# Altium PCB Rev3_3_PCB.PcbDoc (part 1 of 2)
Units mm, origin at the board's own origin, x right, y up, seen from the top; angles counter-clockwise.
Board outline 83.3 x 97.3 mm, 4 copper layers (Top Layer, Ground, Power, Bottom Layer), stack 1.527 mm thick; 95 components, 66 nets, 384 pads, 113 vias.
Unrouted connection lines stored in the file: 27.
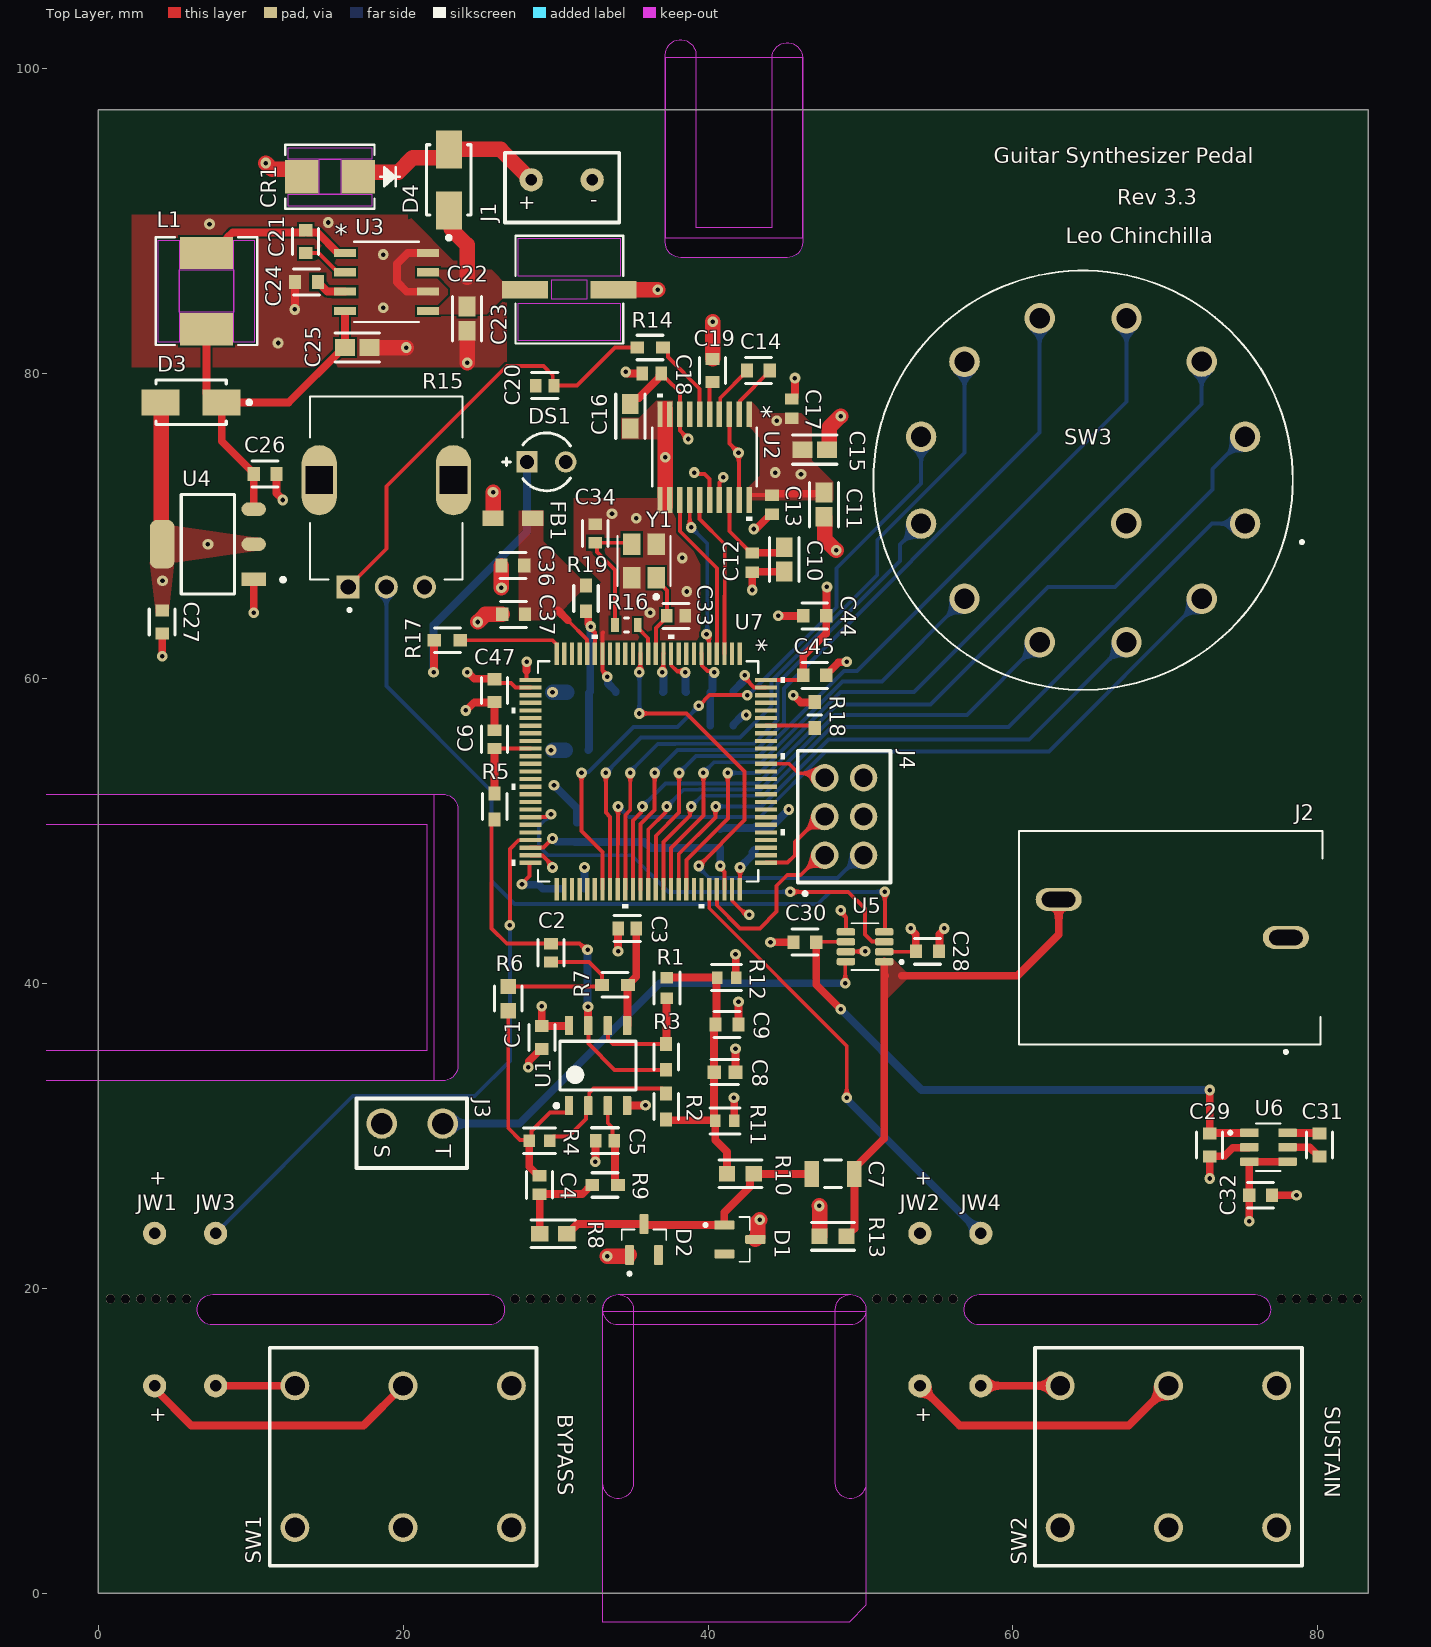
[diagram p0: Top Layer view]
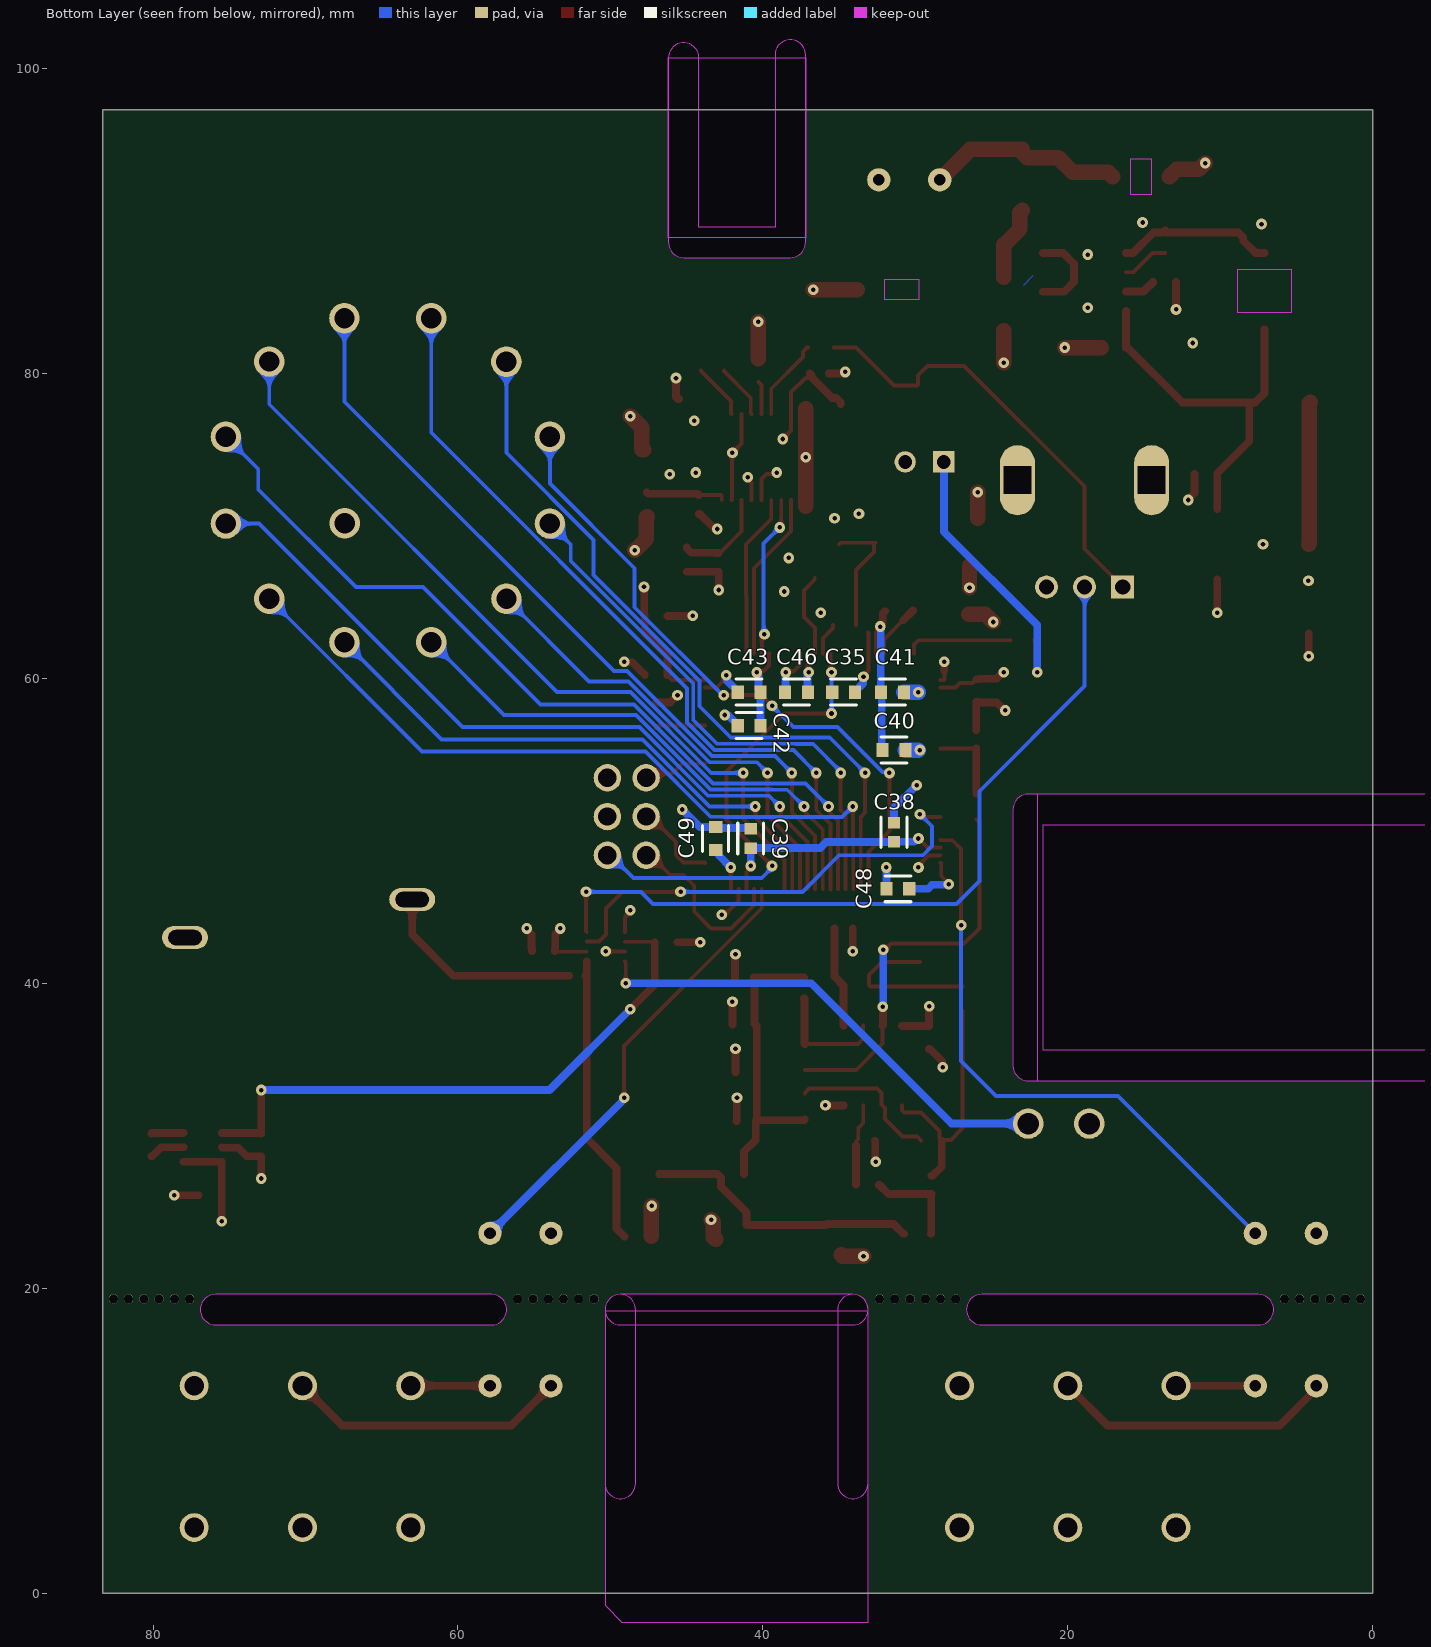
[diagram p1: Bottom Layer view, seen from below]
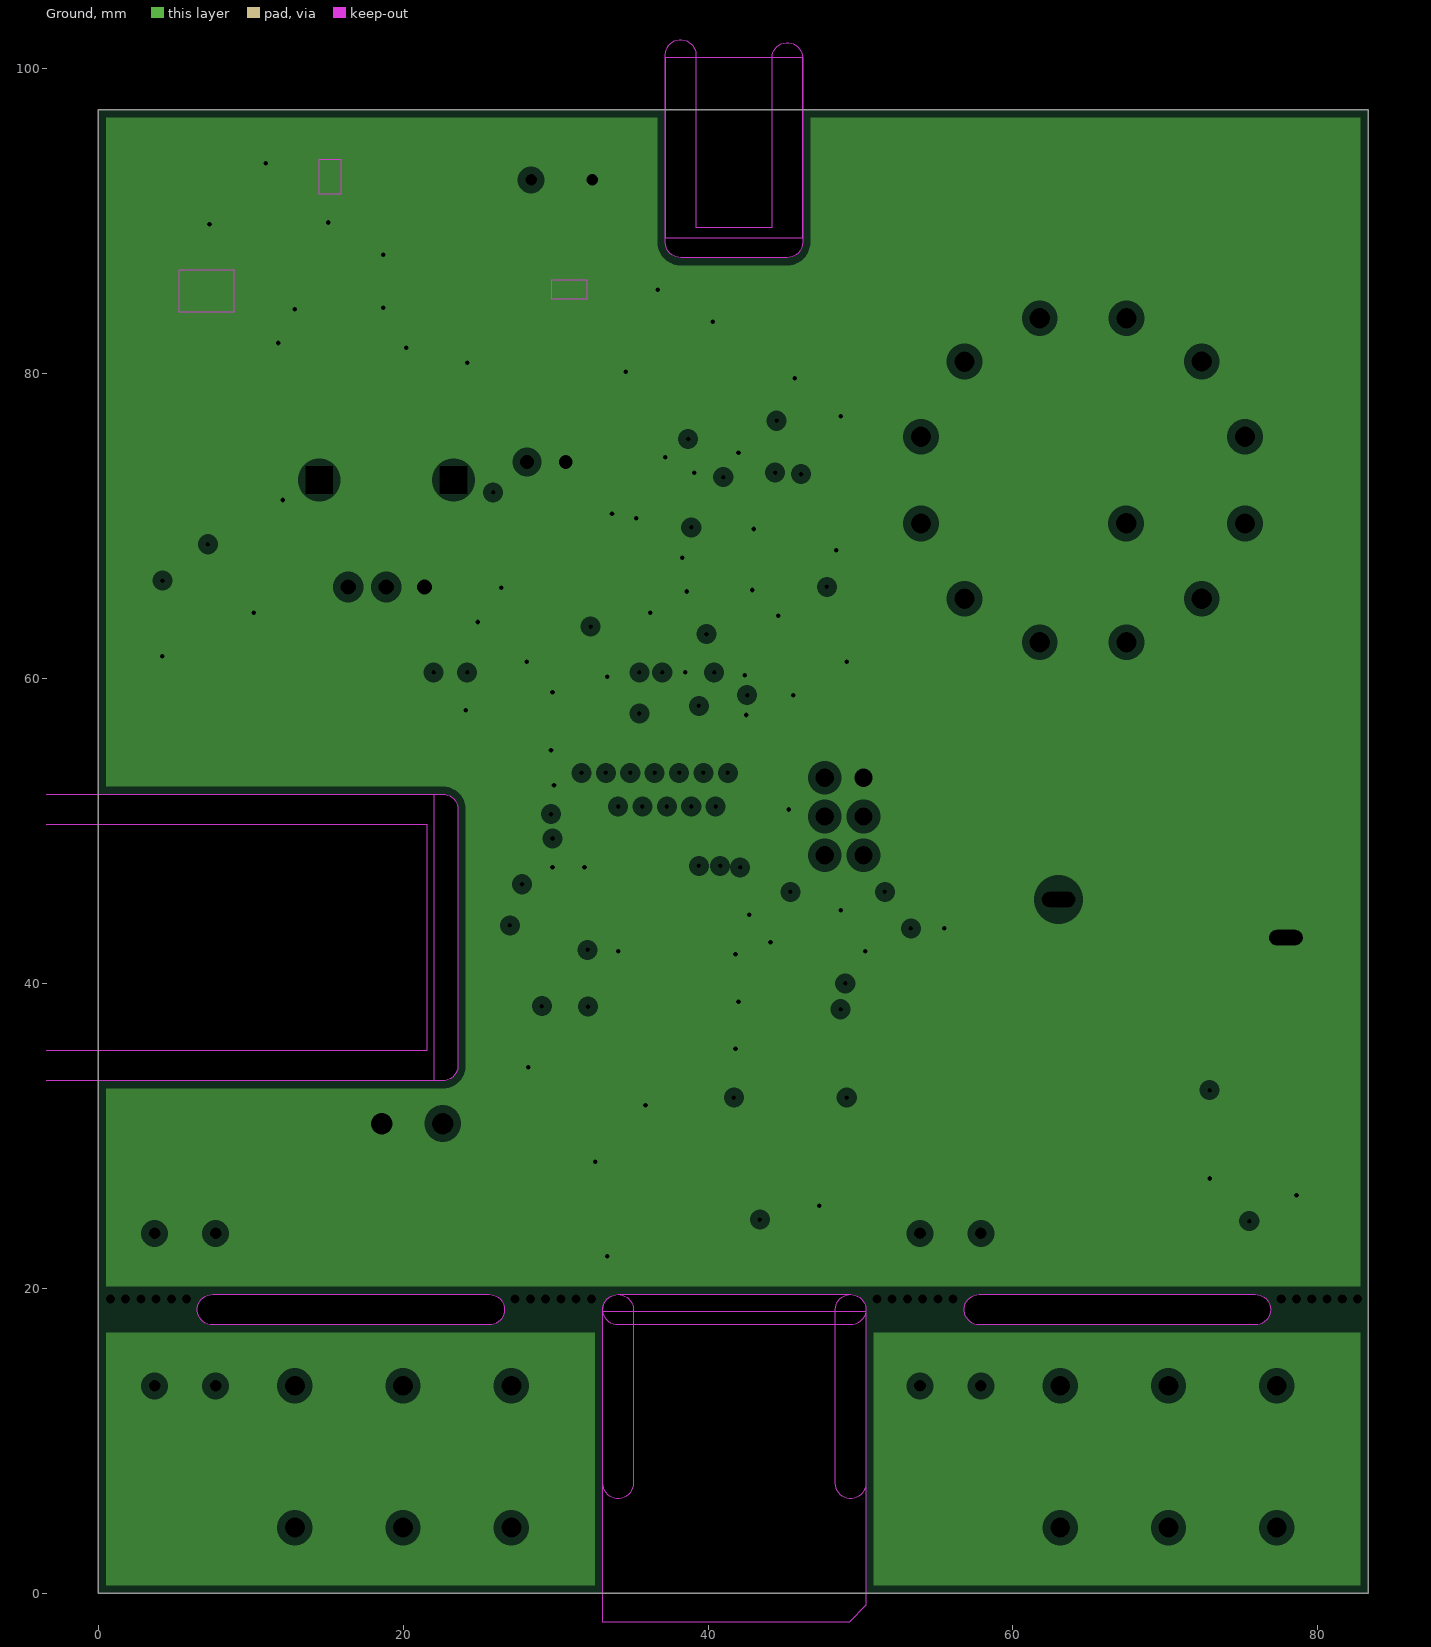
[diagram p2: Ground, clearances drawn from the general rule]
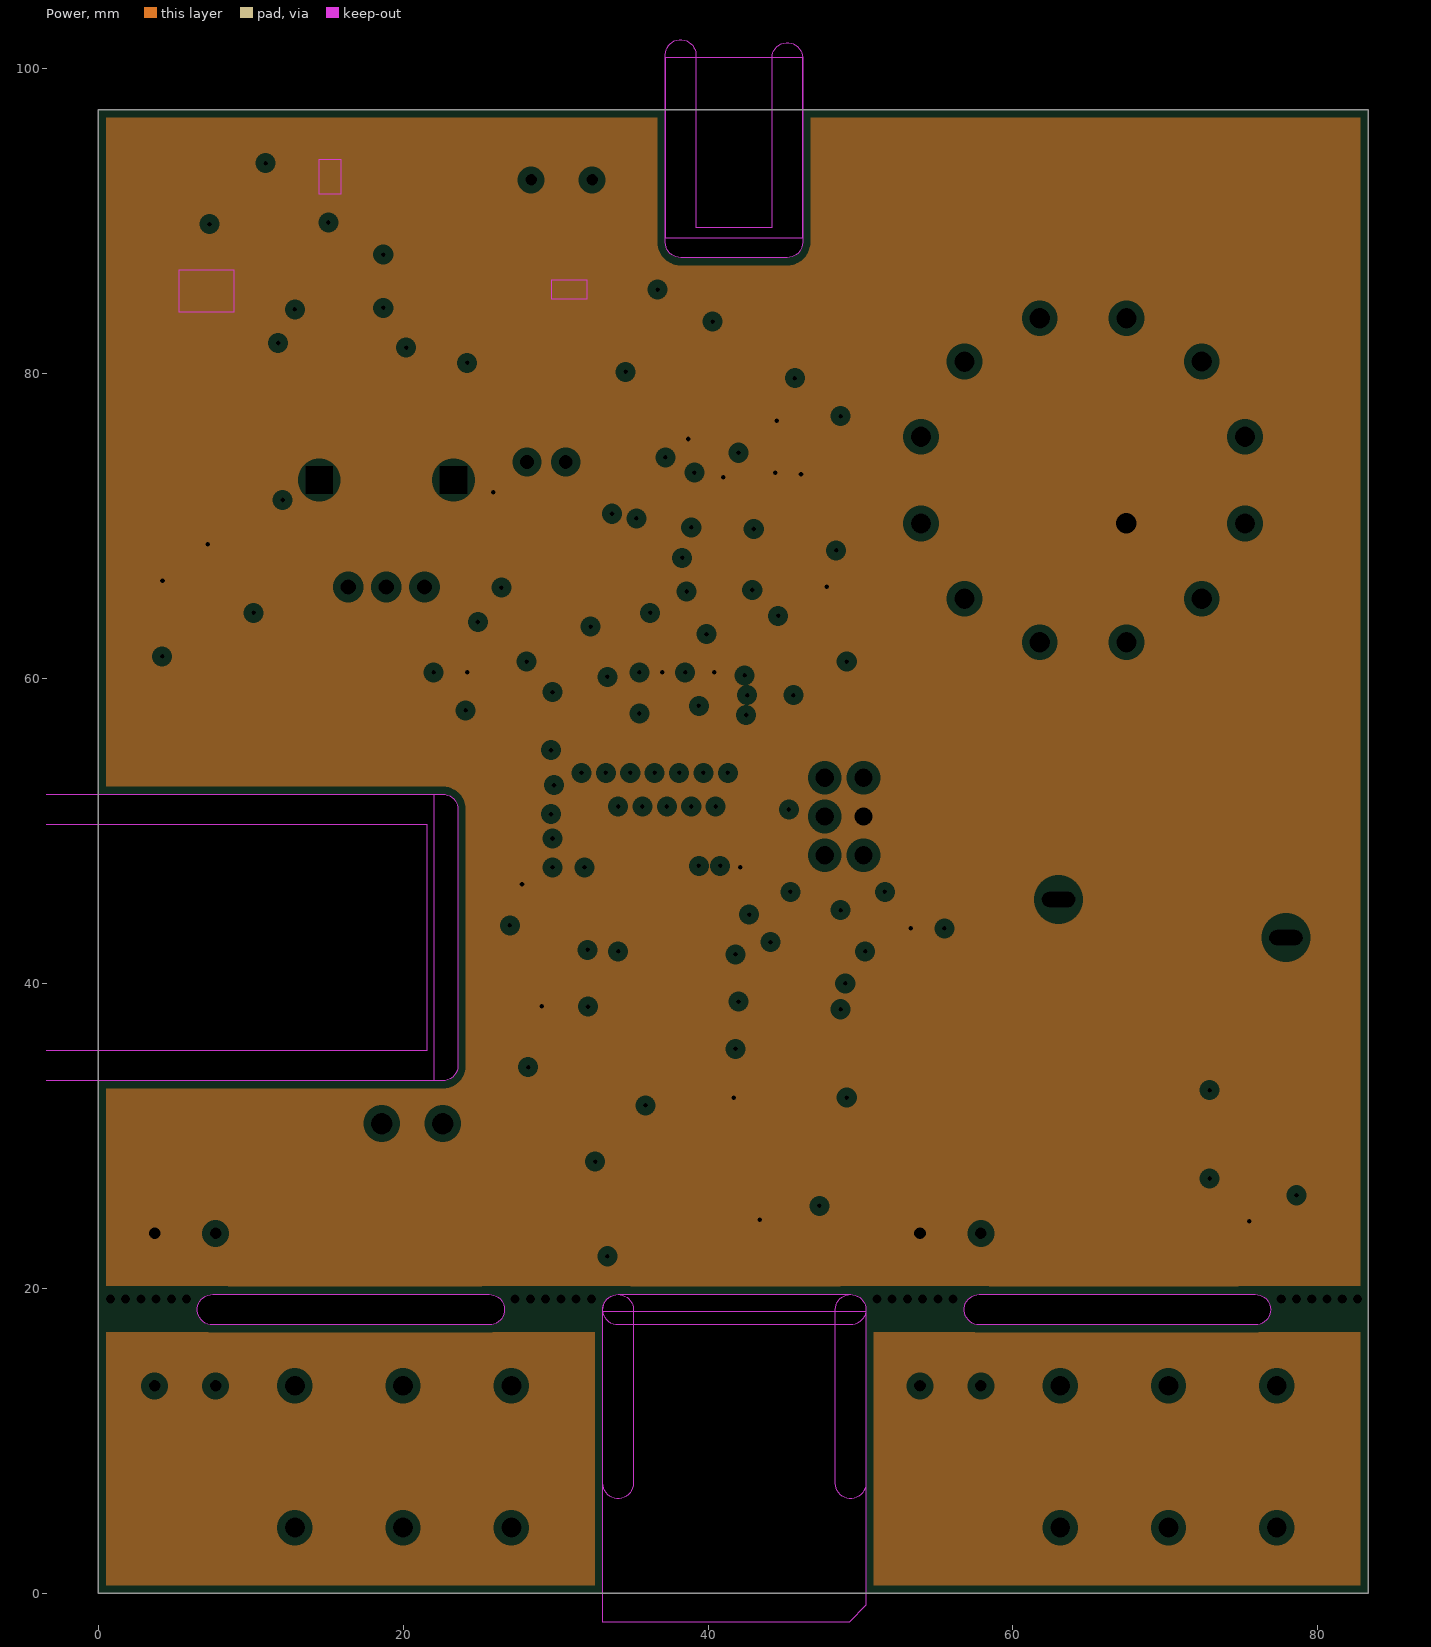
[diagram p3: Power, clearances drawn from the general rule]
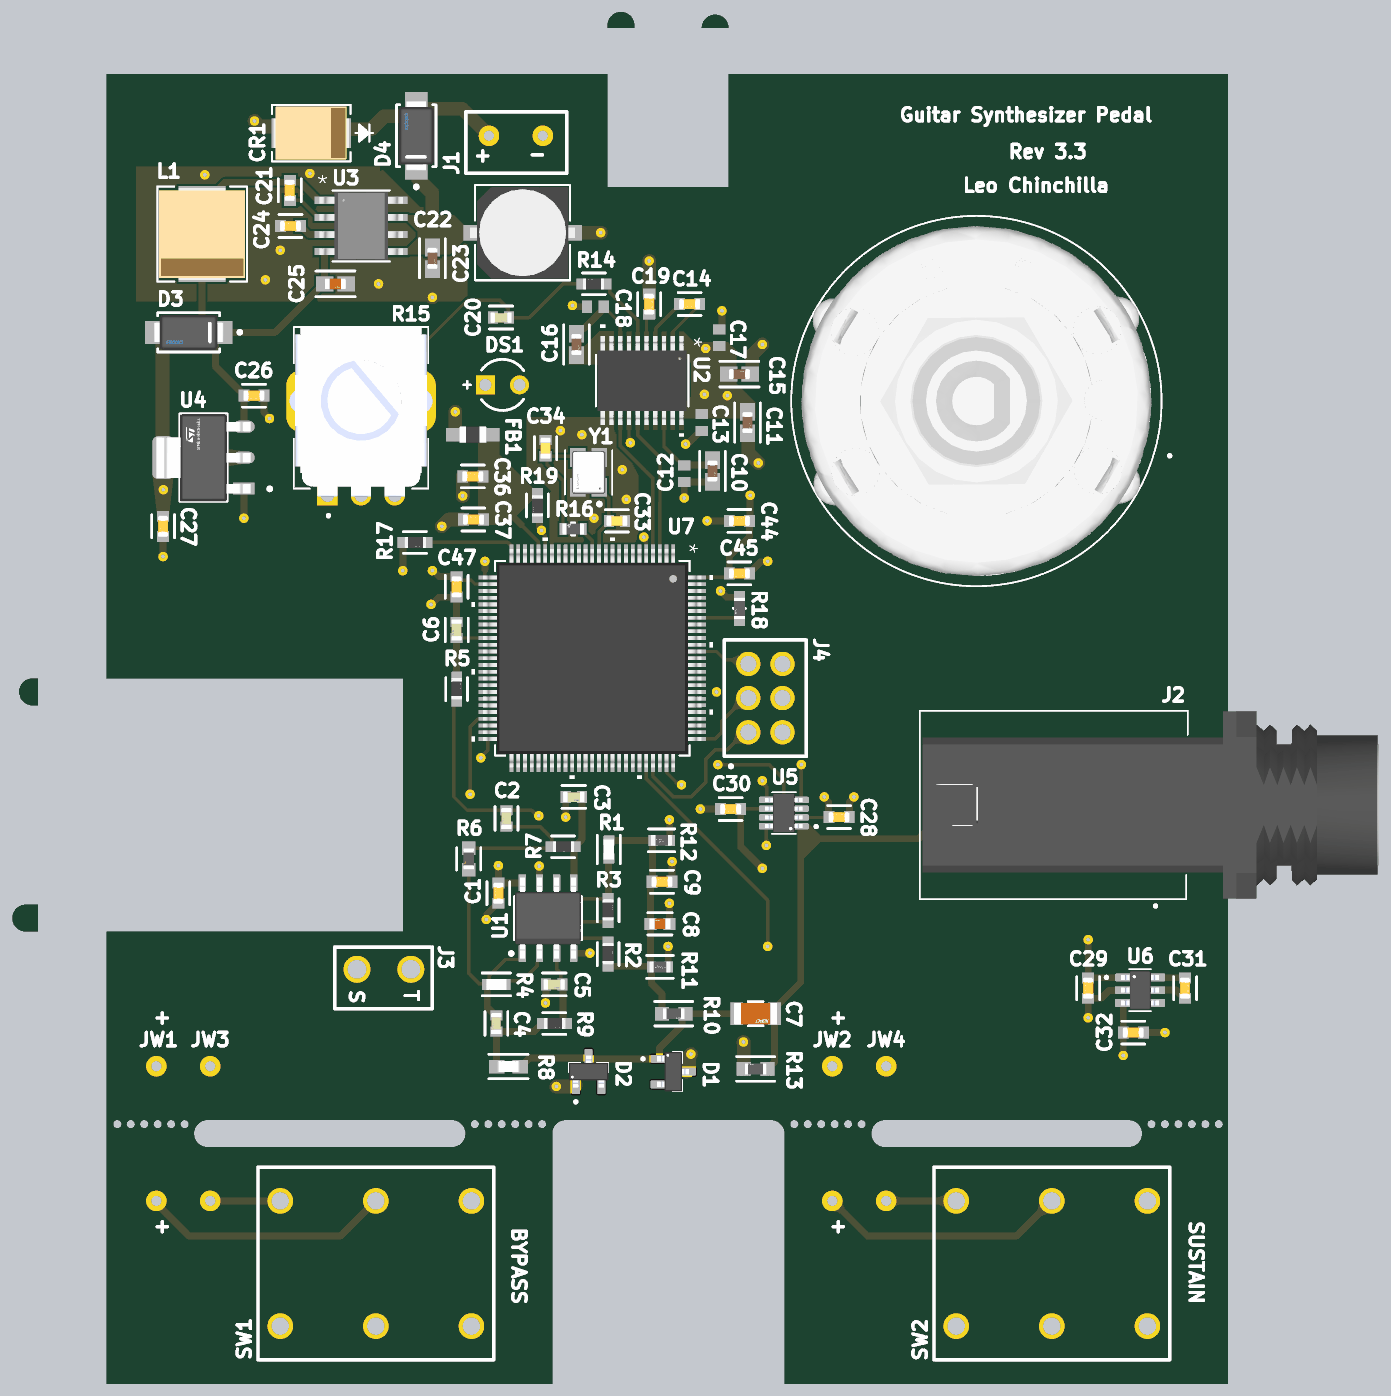
[diagram p5: 3D render of the assembled board from above, using the file's embedded part models]
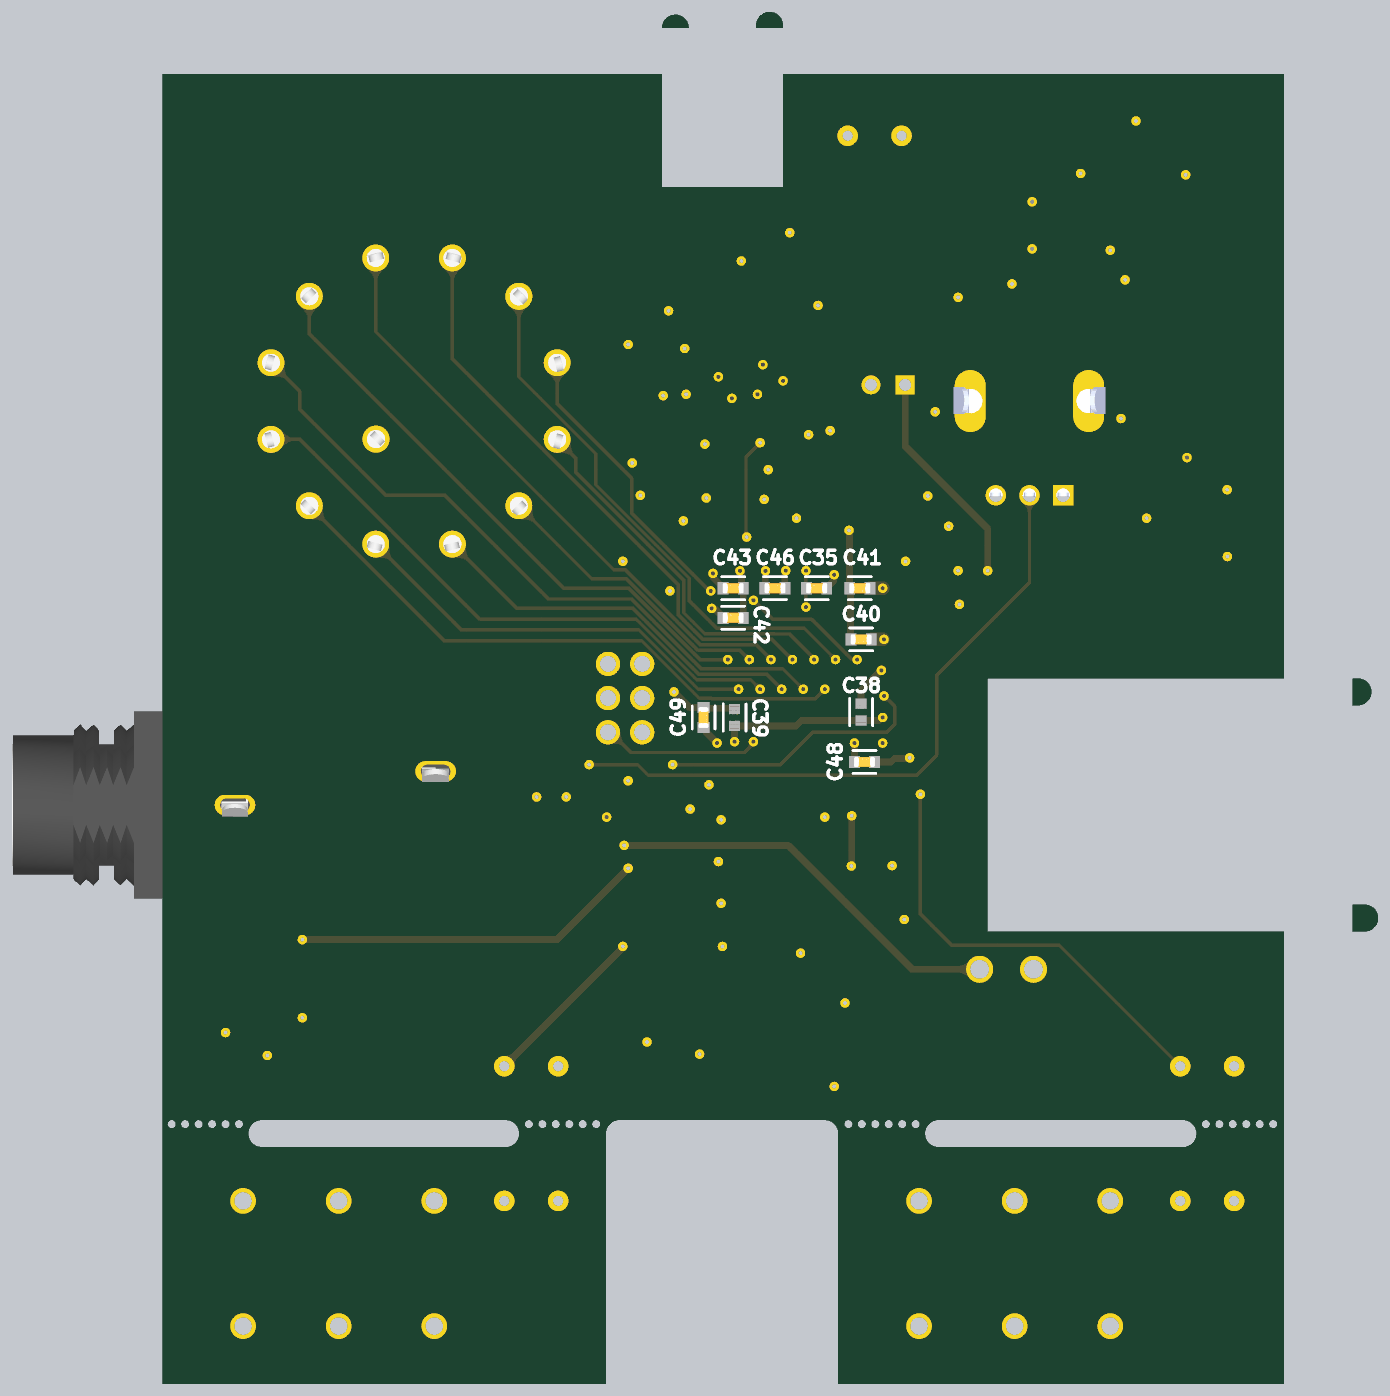
[diagram p6: 3D render of the assembled board from below, using the file's embedded part models]

## Layer stack, top to bottom
Top Solder: solder mask 0.03, Solder Resist, Dk 3.5
Top Layer: signal copper 0.0175
Dielectric 2: prepreg 0.196, PP-006, Dk 4.1
Ground: plane copper 0.035, net GND
Dielectric 1: dielectric 1.03, FR-4, Dk 4.8
Power: plane copper 0.035, net +3V3
Dielectric 3: prepreg 0.196, PP-006, Dk 4.1
Bottom Layer: signal copper 0.0175
Bottom Solder: solder mask 0.03, Solder Resist, Dk 3.5

## Board outline
0,0 83.3,0 83.3,97.3 0,97.3
cut-out: 38.2,87.6 cw(c38.2,88.6) 37.2,88.6 37.2,100.9 cw(c38.2,100.9) 39.2,100.9 39.2,89.6 44.2,89.6 44.2,100.7 cw(c45.2,100.7) 46.2,100.7 46.2,88.6 cw(c45.2,88.6) 45.2,87.6
cut-out: 7.5,17.6 cw(c7.5,18.6) 7.5,19.6 25.65,19.6 cw(c25.65,18.6) 26.651,18.6 cw(c25.65,18.6) 25.65,17.6
cut-out: 34.1,17.599 cw(c34.1,18.6) 34.1,19.6 49.35,19.6 cw(c49.35,18.6) 50.35,18.6 cw(c49.35,18.6) 49.35,17.599
cut-out: 35.101,7.2 cw(c34.1,7.2) 33.1,7.2 33.1,18.6 cw(c34.1,18.6) 34.1,19.6 cw(c34.1,18.6) 35.101,18.6
cut-out: -6,33.6 cw(c-6,34.6) -6,35.6 21.6,35.6 21.6,50.4 -5.5,50.4 cw(c-5.5,51.4) -5.5,52.4 22.6,52.4 cw(c22.6,51.4) 23.6,51.4 23.6,34.6 cw(c22.6,34.6) 22.6,33.6
cut-out: 33.1,18.5 50.35,18.5 50.35,-0.8 49.25,-1.9 33.1,-1.9
cut-out: 50.351,7.2 cw(c49.35,7.2) 48.35,7.2 48.35,18.599 cw(c49.35,18.599) 49.35,19.6 cw(c49.35,18.599) 50.351,18.599
cut-out: 57.8,17.599 cw(c57.8,18.6) 57.8,19.6 75.9,19.6 cw(c75.9,18.6) 76.9,18.6 cw(c75.9,18.6) 75.9,17.599
cut-out: 37.2,88.9 46.2,88.9 46.2,100.7 37.2,100.7
cut-out: 22,52.4 22,33.6 -5.1,33.6 -5.1,52.4

## Design rules (kind name [scope] priority, off if disabled: settings)
Clearance Clearance_L1 [InComponent('L1') vs InComponent('L1')] p1: gap=0.05 ignorepadtopadclearanceinfootprint=TRUE
Clearance Clearance_CR1 [InComponent('CR1') vs InComponent('CR1')] p2: gap=0.05 ignorepadtopadclearanceinfootprint=TRUE
Clearance Clearance_C3 [InComponent('C3') vs InComponent('C3')] p3: gap=0 ignorepadtopadclearanceinfootprint=TRUE
Clearance [All] p4: gap=0.15 ignorepadtopadclearanceinfootprint=TRUE
Height [All] p1: minheight=0 maxheight=100 prefheight=12.7
HoleSize [IsVia] p1: absolutevalues=TRUE maxlimit=0.3 minlimit=0.3 maxpercent=80.000 minpercent=20.000
MinimumAnnularRing [All] p1: minimumring=0.2
MinimumSolderMaskSliver [All] p1: minsoldermaskwidth=0.102
PlaneClearance [All] p1: clearance=0.508
PlaneConnect [All] p1: planeconnectstyle=Relief reliefexpansion=0.508 reliefentries=4 reliefconductorwidth=0.254 reliefairgap=0.254
PolygonConnect [All] p1: connectstyle=Direct reliefconductorwidth=0.254 reliefentries=4 polygonreliefangle="90 Angle" airgapwidth=0.254
RoutingVias [All] p1: holewidth=0.3 width=0.7 viastyle="Through Hole" minholewidth=0.3 minwidth=0.7 maxholewidth=0.711 maxwidth=1.27
SolderMaskExpansion [All] p1: expansion=0 istentingtop=FALSE
SupplyNets "Schematic Supply Nets_9" [InNet('VNEG')] p1: voltage=0.000
SupplyNets "Schematic Supply Nets_8" [InNet('+3V3')] p2: voltage=0.000
SupplyNets "Schematic Supply Nets_7" [InNet('+1V65')] p3: voltage=0.000
SupplyNets "Schematic Supply Nets_6" [InNet('VDDA')] p4: voltage=0.000
SupplyNets "Schematic Supply Nets_5" [InNet('VREF+')] p5: voltage=0.000
SupplyNets "Schematic Supply Nets_4" [InNet('LDOO')] p6: voltage=0.000
SupplyNets "Schematic Supply Nets_3" [InNet('VCAP')] p7: voltage=0.000
SupplyNets "Schematic Supply Nets_2" [InNet('+9V_PROT')] p8: voltage=0.000
SupplyNets "Schematic Supply Nets_1" [InNet('+9V')] p9: voltage=0.000
SupplyNets "Schematic Supply Nets" [InNet('GND')] p10: voltage=0.000
Width Width_Power [InNet('+1V65') OR InNet('+3V3') OR InNet('GND') OR InNet('+9V') OR InNet('+9V_PROT')] p1: maxlimit=1.016 minlimit=0.254 preferedwidth=0.508
Width [All] p2: maxlimit=0.508 minlimit=0.254 preferedwidth=0.254
25 further rules are at their usual default settings.

## Classes and differential pairs
component class "Analog Output": C10 C11 C12 C13 C14 C15 C16 C17 C18 C19 C20 R14 U2
component class "MCU IOs": C33 C34 C35 DS1 J4 R16 R17 R18 U7 Y1
component class "Master Control": C28 C29 C30 C31 C32 J2 J3 JW1 JW2 JW3 JW4 R15 SW1 SW2 SW3 U5 U6
component class "Board Power": C21 C22 C23 C24 C25 C26 C27 CR1 D3 D4 J1 L1 U3 U4
component class "MCU Power": C36 C37 C38 C39 C40 C41 C42 C43 C44 C45 C46 C47 C48 C49 FB1 R19
component class "Analog Input": C1 C2 C3 C4 C5 C6 C7 C8 C9 D1 D2 R1 R2 R3 R4 R5 R6 R7 R8 R9 R10 R11 R12 R13 U1

## Components (designator, comment, footprint, x,y, rotation, side; value= is the part's Value field where it differs from the comment)
C1 "100nF" FP-CC0603-DA-MFG 29.1,36.45 r270 top value="100 nF"
C2 "4.7nF" FP-C0603C-CF-MFG 29.7,42 r90 top value="4,700 pF"
C3 "1nF" FP-C0603C-CF-MFG 34.7,43.6 r180 top value="1,000 pF"
C4 "4.7nF" FP-C0603C-CF-MFG 28.95,26.775 r90 top value="4,700 pF"
C5 "0.47nF" FP-C0603C-CF-MFG 33.25,29.675 r180 top value="470 pF"
C6 "1nF" FP-C0603C-CF-MFG 26,56 r90 top value="1,000 pF"
C7 "100nF" FP-C1206C104F3GAC-MFG 48.2,27.5 r180 top
C8 "10uF" FP-CC0603-DC-MFG 41.1,34.175 r0 top
C9 "100nF" FP-CC0603-DA-MFG 41.25,37.3 r180 top value="100 nF"
C10 "10uF" FP-GRM188-0_2-IPC_A 45,67.8 r270 top
C11 "10uF" FP-GRM188-0_2-IPC_A 47.6,71.4 r270 top
C12 "0.1uF" CAPC1608X92X38LL15T08 42.9,67.6 r90 top
C13 "0.1uF" CAPC1608X92X38LL15T08 44.2,71.4 r90 top
C14 "2.2uF" FP-CC0603-DA-MFG 43.3,80.2 r0 top value="2.2 uF"
C15 "10uF" FP-GRM188-0_2-IPC_A 47,75 r0 top
C16 "10uF" FP-GRM188-0_2-IPC_A 34.9,77.2 r270 top
C17 "0.1uF" CAPC1608X92X38LL15T08 45.5,77.7 r270 top
C18 "0.1uF" CAPC1608X92X38LL15T08 36.3,80 r0 top
C19 "2.2uF" FP-CC0603-DA-MFG 40.3,80.2 r90 top value="2.2 uF"
C20 "2.2nF" FP-C0603C-CF-MFG 29.3,79.2 r180 top value="2,200 pF"
C21 "100nF" FP-CC0603-DA-MFG 13.611,88.65 r90 top value="100 nF"
C22 "10uF" FP-GRM188-0_2-IPC_A 24.2,83.6 r270 top
C23 "100uF" CAP_EEFK_D8_PAN 30.9,85.5 r0 top
C24 "1uF" FP-CC0603-DA-MFG 13.661,86 r180 top value="1 uF"
C25 "22uF" FP-GRM188-0_2-IPC_A 16.999,81.7 r0 top
C26 "1uF" FP-CC0603-DA-MFG 10.95,73.4 r0 top value="1 uF"
C27 "4.7uF" FP-CC0603-DA-MFG 4.2,63.7 r270 top value="4.7 uF"
C28 "100nF" FP-CC0603-DA-MFG 54.4,42.1 r180 top value="100 nF"
C29 "2.2uF" FP-CC0603-DA-MFG 72.9,29.4 r270 top value="2.2 uF"
C30 "100nF" FP-CC0603-DA-MFG 46.35,42.7 r0 top value="100 nF"
C31 "1uF" FP-CC0603-DA-MFG 80.1,29.4 r90 top value="1 uF"
C32 "2.2uF" FP-CC0603-DA-MFG 76.25,26.1 r0 top value="2.2 uF"
C33 "8pF" FP-CBR06C-MFG 37.9,64.1 r0 top value="8.0 pF"
C34 "8pF" FP-CBR06C-MFG 32.6,69.5 r90 top value="8.0 pF"
C35 "100nF" FP-CC0603-DA-MFG 34.7,59.1 r0 bottom value="100 nF"
C36 "1uF" FP-CC0603-DA-MFG 27.2,67.4 r180 top value="1 uF"
C37 "100nF" FP-CC0603-DA-MFG 27.25,64.2 r180 top value="100 nF"
C38 "2.2uF" FP-CL10-IPC_C 31.4,49.9 r90 bottom
C39 "2.2uF" FP-CL10-IPC_C 40.8,49.5 r90 bottom
C40 "1uF" FP-CC0603-DA-MFG 31.4,55.3 r180 bottom value="1 uF"
C41 "100nF" FP-CC0603-DA-MFG 31.5,59.1 r180 bottom value="100 nF"
C42 "1uF" FP-CC0603-DA-MFG 40.9,56.9 r0 bottom value="1 uF"
C43 "100nF" FP-CC0603-DA-MFG 40.9,59.1 r0 bottom value="100 nF"
C44 "4.7uF" FP-CC0603-DA-MFG 47,64.1 r180 top value="4.7 uF"
C45 "100nF" FP-CC0603-DA-MFG 47,60.2 r0 top value="100 nF"
C46 "100nF" FP-CC0603-DA-MFG 37.8,59.1 r0 bottom value="100 nF"
C47 "100nF" FP-CC0603-DA-MFG 26,59.2 r270 top value="100 nF"
C48 "100nF" FP-CC0603-DA-MFG 31.15,46.2 r0 bottom value="100 nF"
C49 "100nF" FP-CC0603-DA-MFG 43.1,49.5 r90 bottom value="100 nF"
CR1 "P6SMB20A" P6SMBSeries_LTF 15.2,92.9 r180 top
D1 "BAS116_RF" SOT95P237X112-3N 42.085,23.2 r0 top
D2 "BAS116_RF" SOT95P237X112-3N 35.8,23.2 r90 top
D3 "B160-13-F" FP-SMA-MFG 6.1,78.1 r180 top
D4 "B160-13-F" FP-SMA-MFG 23,92.7 r90 top
DS1 "LTL-1CHE" INDPR60-254-520X380X650 29.4,74.2 r0 top
FB1 "600Ω @ 100MHz" WE-MPSB_0805_L2W1.2H0.9 27.2,70.5 r0 top
J1 "Power Jack" PowerJack 32.4,92.7 r180 top
J2 "SJ-63062A" CUI_SJ-63062A 77.9,43 r180 top
J3 "Audio Jack" AudioJack 18.6,30.8 r270 top
J4 "ST-LINK" STLINK_Header 50.2,53.48 r180 top
JW1 "Footswitch_Jumper" Footswitch_Jumper 3.7,13.6 r90 top
JW2 "Footswitch_Jumper" Footswitch_Jumper 53.9,13.6 r90 top
JW3 "Footswitch_Jumper" Footswitch_Jumper 7.7,13.6 r90 top
JW4 "Footswitch_Jumper" Footswitch_Jumper 57.9,13.6 r90 top
L1 "33uH" IND_PCC-M0630M-LP_PAN 7.1,85.4 r90 top
R1 "1.13kΩ" FP-RN73R1J-IPC_C 37.3,39.7 r270 top
R2 "10kΩ" FP-RT0603-MFG 37.25,31.925 r90 top value=10KΩ
R3 "680Ω" FP-RT0603-MFG 37.25,35.175 r90 top
R4 "15.2kΩ" FP-RN73R1J-IPC_C 28.95,29.675 r0 top
R5 "100Ω" FP-RT0603-MFG 26,51.6 r90 top
R6 "2.52kΩ" FP-TFCR0603-MFG 26.9,39 r90 top
R7 "14.7kΩ" FP-RT0603-MFG 33.9,39.9 r0 top value=14.7KΩ
R8 "1.15kΩ" FP-RN73R1J-IPC_A 29.85,23.575 r180 top
R9 "68.1kΩ" FP-RT0603-MFG 33.25,26.775 r0 top value=68.1KΩ
R10 "2MΩ" FP-AC0603-IPC_A 42.123,27.5 r0 top
R11 "100kΩ" FP-RQ731J-IPC_C 41.1,30.975 r0 top value=100KΩ
R12 "100kΩ" FP-RQ731J-IPC_C 41.226,40.375 r180 top value=100KΩ
R13 "2MΩ" FP-AC0603-IPC_A 48.2,23.4 r180 top
R14 "470Ω" FP-RT0603-MFG 36.2,81.7 r180 top
R15 "PT01-D125D-A103" TRIM_PT01-D125D-A103 18.9,73 r0 top
R16 "0Ω" FP-CRCW0603-C-MFG 34.65,63.5 r0 top
R17 "220Ω" FP-RT0603-MFG 22.9,62.5 r0 top
R18 "10kΩ" FP-AT0603-MFG 47,57.6 r270 top
R19 "47Ω" FP-RT0603-MFG 32,65.25 r270 top
SW1 "DPDT_Pushbutton" DPDT_Pushbutton 27.1,13.6 r180 top
SW2 "DPDT_Pushbutton" DPDT_Pushbutton 77.3,13.6 r180 top
SW3 "KC52A30.001NPS" SW_KC52A30.001NPS 64.6,73 r90 top
U1 "OPA2340UA" D0008A_L 32.785,34.6 r90 top
U2 "PCM5101APWR" PW20 39.775,74.519 r270 top
U3 "L6981N50DR" SO8L_L6981N33DR_STM 18.911,86 r0 top
U4 "LDL1117S33R" FP-SOT223-0046067-IPC_C 7.2,68.8 r180 top
U5 "MAX4564EKA+T" SOT65P280X145-8N 50.3,42.4 r180 top
U6 "LM2776DBVR" SOT95P280X145-6N 76.755,29.25 r0 top
U7 "STM32H723VET6" LQFP100_STM 36.078,53.9 r270 top locked
Y1 "25 MHz" ABM8W_MFG 35.8,67.7 r90 top

## Footprints (in the part's own frame and the unit in brackets; to place one, negate y for a bottom-side part, rotate by r counter-clockwise, add the part's x,y. Pads: shape width x height; smd on the part's side, far side on the other; paste and mask are expansions set on the pad)
ABM8W_MFG [mm] "Recommended Land Pattern"
  rect 1.4x1.15 smd: 1(-1.1,-0.8) 2(1.1,-0.8) 3(1.1,0.8) 4(-1.1,0.8)
  silkscreen extent -2.47,-1.75 1.65,1.75, body extent -1.9,-1.48 1.9,1.48, height 0.25
AudioJack [mm]
  round 2 hole 1.4: S(0,0) T(0,4)
  silkscreen extent -1.65,-1.65 2.92,5.59
CAP_EEFK_D8_PAN [mm]
  rect 2.991x1.162 smd paste+0 mask+0: 1(-2.903,0) 2(2.903,0)
  Top Layer keep-out region: -3.353,-3.353 -3.353,-0.889 3.353,-0.889 3.353,-3.353
  Top Layer keep-out region: -3.353,0.889 -3.353,3.353 3.353,3.353 3.353,0.889
  Top Layer keep-out region: -1.143,-0.632 -1.143,0.632 1.143,0.632 1.143,-0.632
  Keep-Out Layer region: -1.143,-0.632 -1.143,0.632 1.143,0.632 1.143,-0.632
  silkscreen extent -3.53,-3.53 3.53,3.53, body extent -3.9,-3.4 3.9,3.4, height 8.05
CAPC1608X92X38LL15T08 [mm] "Chip Capacitor, 2-Leads, Body 1.60x0.80mm, IPC High Density"
  rect 0.75x0.9 smd: 1(-0.625,0) 2(0.625,0)
  body extent -0.87,-0.48 0.87,0.48, height 0.92
CUI_SJ-63062A [mm]
  oval 3.016x1.508 hole 1 slot 2.2 at 0 deg: 1(0,0) 2(14.9,-2.5)
  silkscreen extent -2.4,-7 17.5,7.6, body extent -16.55,-6.95 17.3,6.95, height 12.52
D0008A_L [mm] "SOIC, 8-Leads, Body 5x4mm, Pitch 1.27mm, IPC High Density"
  rrect18% 1.25x0.55 smd: 1(-2.625,1.905) 2(-2.625,0.635) 3(-2.625,-0.635) 4(-2.625,-1.905) 5(2.625,-1.905) 6(2.625,-0.635) 7(2.625,0.635) 8(2.625,1.905)
  silkscreen extent -2.75,-2.5 1.6,2.85, body extent -3,-2.45 3,2.45, height 1.63
DPDT_Pushbutton [mm]
  round 1.9 hole 1.3: 1(7.1,0) 2(7.1,9.3) 3(0,0) 4(14.2,0) 5(0,9.3) 6(14.2,9.3)
  silkscreen extent -1.65,-2.5 15.85,11.8
Footswitch_Jumper [mil]
  round 60 hole 30: 1(0,0) 2(393.7,0)
FP-AC0603-IPC_A [mm]
  rect 1.059x1.012 smd paste+0 mask+0: 1(-0.877,0) 2(0.877,0)
  silkscreen extent -1.41,-0.91 1.41,0.91, body extent -1.91,-1.01 1.91,1.01, height 0.25
FP-AT0603-MFG [mm]
  rect 0.9x0.8 smd paste+0 mask+0: 1(-0.85,0) 2(0.85,0)
  silkscreen extent 0,-0.45 0,0.45, body extent -1.4,-0.55 1.4,0.55, height 0.25
FP-C0603C-CF-MFG [mm]
  rect 0.75x0.9 smd paste+0 mask+0: 1(-0.6,0) 2(0.6,0)
  silkscreen extent -0.87,-0.85 0.88,0.85, body extent -1.2,-0.6 1.2,0.6, height 0.25
FP-C1206C104F3GAC-MFG [mm]
  rect 0.95x1.7 smd paste+0 mask+0: 1(-1.4,0) 2(1.4,0)
  silkscreen extent -0.55,-0.9 0.55,0.9, body extent -2,-1 2,1, height 0.25
FP-CBR06C-MFG [mm]
  rect 0.75x0.9 smd paste+0 mask+0: 1(-0.6,0) 2(0.6,0)
  silkscreen extent -0.85,-0.82 0.85,0.82, body extent -1.2,-0.6 1.2,0.6, height 0.25
FP-CC0603-DA-MFG [mm]
  rect 0.8x0.9 smd paste+0 mask+0: 1(-0.75,0) 2(0.75,0)
  silkscreen extent -0.85,-0.85 0.85,0.85, body extent -1.35,-0.75 1.35,0.75, height 0.25
FP-CC0603-DC-MFG [mm]
  rect 0.9x0.9 smd paste+0 mask+0: 1(-0.7,0) 2(0.7,0)
  silkscreen extent -0.9,-0.82 0.9,0.82, body extent -1.35,-0.75 1.35,0.75, height 0.25
FP-CL10-IPC_C [mm]
  rect 0.758x0.812 smd paste+0 mask+0: 1(-0.627,0) 2(0.627,0)
  silkscreen extent -1.01,-0.85 1.01,0.85, body extent -0.8,-0.4 0.8,0.4, height 0.9
FP-CRCW0603-C-MFG [mm]
  rect 0.5x0.9 smd paste+0 mask+0: 1(-0.75,0) 2(0.75,0)
  silkscreen extent -0.13,-0.45 0.13,0.45, body extent -1.1,-0.55 1.1,0.55, height 0.25
FP-GRM188-0_2-IPC_A [mm]
  rect 1.305x1.106 smd paste+0 mask+0: 1(-0.801,0) 2(0.801,0)
  silkscreen extent -1.45,-0.95 1.45,0.95, body extent -1.95,-1.05 1.95,1.05, height 0.25
FP-RN73R1J-IPC_A [mm]
  rect 1.156x1.012 smd paste+0 mask+0: 1(-0.875,0) 2(0.875,0)
  silkscreen extent -1.45,-0.91 1.45,0.91, body extent -1.95,-1.01 1.95,1.01, height 0.25
FP-RN73R1J-IPC_C [mm]
  rect 0.756x0.812 smd paste+0 mask+0: 1(-0.675,0) 2(0.675,0)
  silkscreen extent -1.05,-0.85 1.05,0.85, body extent -1.15,-0.55 1.15,0.55, height 0.25
FP-RQ731J-IPC_C [mm]
  rect 0.71x0.812 smd paste+0 mask+0: 1(-0.626,0) 2(0.626,0)
  silkscreen extent -0.98,-0.85 0.98,0.85, body extent -1.08,-0.55 1.08,0.55, height 0.25
FP-RT0603-MFG [mm]
  rect 0.9x0.8 smd paste+0 mask+0: 1(-0.85,0) 2(0.85,0)
  silkscreen extent -0.85,-0.81 0.86,0.8, body extent -1.4,-0.55 1.4,0.55, height 0.25
FP-SMA-MFG [mm]
  rect 2.5x1.7 smd paste+0 mask+0: 1(-2,0) 2(2,0)
  silkscreen extent -3.93,-1.46 2.3,1.46, body extent -3.35,-1.56 3.35,1.56, height 0.25
FP-SOT223-0046067-IPC_C [mm]
  rect 1.604x0.88 smd paste+0 mask+0: 1(-3,2.3)
  rrect100% 1.604x0.88 smd paste+0 mask+0: 2(-3,0) 3(-3,-2.3)
  rrect55% 1.604x3.18 smd paste+0 mask+0: 4(3,0)
  silkscreen extent -5.05,-3.25 1.75,3.25, body extent -3.9,-3.35 3.9,3.35, height 0.25
FP-TFCR0603-MFG [mm]
  rect 1x1 smd paste+0 mask+0: 1(-0.8,0) 2(0.8,0)
  silkscreen extent -0.82,-0.9 0.82,0.9, body extent -1.4,-0.6 1.4,0.6, height 0.25
IND_PCC-M0630M-LP_PAN [mil]
  rect 83x137 smd paste+0 mask+0: 1(-98.5,0) 2(98.5,0)
  Top Layer keep-out region: -132,-124 -132,-70.5 132,-70.5 132,-124
  Top Layer keep-out region: -132,70.5 -132,124 132,124 132,70.5
  Top Layer keep-out region: -55,-70.5 -55,70.5 55,70.5 55,-70.5
  Keep-Out Layer region: -55,-70.5 -55,70.5 55,70.5 55,-70.5
  silkscreen extent -139,-131 139,131, body extent -134,-126 134,126, height 120
INDPR60-254-520X380X650 [mm] "THD, 2-Leads, Dia 3.8mm, Pitch 2.54mm"
  rect 1.4x1.4 hole 0.9: 1(-1.27,0)
  round 1.4 hole 0.9: 2(1.27,0)
  silkscreen extent -2.87,-1.9 1.58,1.9, body extent -1.9,-1.9 1.9,1.9, height 6.5
LQFP100_STM [mil]
  rect 57.56x11 smd paste+0 mask+0: 1(-304,236.22) 2(-304,216.54) 3(-304,196.85) 4(-304,177.17) 5(-304,157.48) 6(-304,137.8) 7(-304,118.11) 8(-304,98.43) 9(-304,78.74) 10(-304,59.06) 11(-304,39.37) 12(-304,19.69) 13(-304,0) 14(-304,-19.69) 15(-304,-39.37) 16(-304,-59.06) 17(-304,-78.74) 18(-304,-98.43) 19(-304,-118.11) 20(-304,-137.8) 21(-304,-157.48) 22(-304,-177.17) 23(-304,-196.85) 24(-304,-216.54) 25(-304,-236.22) 51(304,-236.22) 52(304,-216.54) 53(304,-196.85) 54(304,-177.17) 55(304,-157.48) 56(304,-137.8) 57(304,-118.11) 58(304,-98.43) 59(304,-78.74) 60(304,-59.06) 61(304,-39.37) 62(304,-19.69) 63(304,0) 64(304,19.69) 65(304,39.37) 66(304,59.06) 67(304,78.74) 68(304,98.43) 69(304,118.11) 70(304,137.8) 71(304,157.48) 72(304,177.17) 73(304,196.85) 74(304,216.54) 75(304,236.22)
  rect 11x57.56 smd paste+0 mask+0: 26(-236.22,-304) 27(-216.54,-304) 28(-196.85,-304) 29(-177.17,-304) 30(-157.48,-304) 31(-137.8,-304) 32(-118.11,-304) 33(-98.43,-304) 34(-78.74,-304) 35(-59.06,-304) 36(-39.37,-304) 37(-19.68,-304) 38(0,-304) 39(19.69,-304) 40(39.37,-304) 41(59.06,-304) 42(78.74,-304) 43(98.43,-304) 44(118.11,-304) 45(137.8,-304) 46(157.48,-304) 47(177.17,-304) 48(196.85,-304) 49(216.54,-304) 50(236.22,-304) 76(236.22,304) 77(216.54,304) 78(196.85,304) 79(177.17,304) 80(157.48,304) 81(137.8,304) 82(118.11,304) 83(98.43,304) 84(78.74,304) 85(59.06,304) 86(39.37,304) 87(19.68,304) 88(0,304) 89(-19.69,304) 90(-39.37,304) 91(-59.06,304) 92(-78.74,304) 93(-98.43,304) 94(-118.11,304) 95(-137.8,304) 96(-157.48,304) 97(-177.17,304) 98(-196.85,304) 99(-216.54,304) 100(-236.22,304)
  silkscreen extent -353,-353 353,353, body extent -319,-319 319,319, height 63
P6SMBSeries_LTF [mil]
  rect 86x86 smd paste+0 mask+0: 1(-73,0) 2(73,0)
  Top Layer keep-out region: -108,-75.5 -108,-45 108,-45 108,-75.5
  Top Layer keep-out region: -108,45 -108,75.5 108,75.5 108,45
  Top Layer keep-out region: -28,-45 -28,45 28,45 28,-45
  Keep-Out Layer region: -28,-45 -28,45 28,45 28,-45
  silkscreen extent -180,-83 115,83, body extent -110,-77 110,77, height 98
PowerJack [mil]
  round 60 hole 30: 1(157.48,0) 2(0,0)
  silkscreen extent -70,-70 225,110
PW20 [mil]
  rect 66x14 smd paste-33 mask-33: 1(-111,115.16) 2(-111,89.57) 3(-111,63.98) 4(-111,38.39) 5(-111,12.8) 6(-111,-12.8) 7(-111,-38.39) 8(-111,-63.98) 9(-111,-89.57) 10(-111,-115.16) 11(111,-115.16) 12(111,-89.57) 13(111,-63.98) 14(111,-38.39) 15(111,-12.8) 16(111,12.8) 17(111,38.39) 18(111,63.98) 19(111,89.57) 20(111,115.16)
  silkscreen extent -164,-135 164,135, body extent -130,-130 130,130, height 47
SO8L_L6981N33DR_STM [mil]
  rect 57.5x21 smd paste+0 mask+0: 1(-107.25,75) 2(-107.25,25) 3(-107.25,-25) 4(-107.25,-75) 5(107.25,-75) 6(107.25,-25) 7(107.25,25) 8(107.25,75)
  silkscreen extent -84,-104 84,104, body extent -122,-99 122,99, height 69
SOT65P280X145-8N [mm]
  rrect50% 1.21x0.48 smd: 1(-1.255,0.975) 2(-1.255,0.325) 3(-1.255,-0.325) 4(-1.255,-0.975) 5(1.255,-0.975) 6(1.255,-0.325) 7(1.255,0.325) 8(1.255,0.975)
  silkscreen extent -2.5,-1.54 0.88,1.54, body extent -1.4,-1.45 1.4,1.45, height 1.45
SOT95P237X112-3N [mm]
  rrect25% 1.32x0.59 smd paste+0 mask+0.102: 1(-1.015,0.95) 2(-1.015,-0.95) 3(1.015,0)
  silkscreen extent -2.35,-1.46 0.65,1.46, body extent -1.19,-1.46 1.19,1.46, height 1.12
SOT95P280X145-6N [mm]
  rrect25% 1.21x0.58 smd: 1(-1.255,0.95) 2(-1.255,0) 3(-1.255,-0.95) 4(1.255,-0.95) 5(1.255,0) 6(1.255,0.95)
  silkscreen extent -2.6,-1.56 0.8,1.56, body extent -1.4,-1.45 1.4,1.45, height 1.45
STLINK_Header [mm]
  round 1.8 hole 1.2: 1(0,5.08) 2(0,2.54) 3(0,0) 4(2.54,5.08) 5(2.54,2.54) 6(2.54,0)
  silkscreen extent -1.78,-1.78 4.32,7.7
SW_KC52A30.001NPS [mm]
  round 1.995 hole 1.33: 1(-2.847,-10.625) 2(-7.778,-7.778) 3(-10.625,-2.847) 4(-10.625,2.847) 5(-7.778,7.778) 6(-2.847,10.625) 7(2.847,10.625) 9(10.625,2.847) 10(10.625,-2.847) 11(7.778,-7.778) 12(2.847,-10.625)
  round 2.01 hole 1.34: 8(7.778,7.778) A(-2.828,-2.828)
  silkscreen extent -13.75,-14.45 13.75,13.75, body extent -13,-13 13,13, height 52.2
TRIM_PT01-D125D-A103 [mm]
  rect 1.508x1.508 / inner round 1.508 / far side rect 1.508x1.508 hole 1: 1(-2.5,-7)
  round 1.508 hole 1: 2(0,-7) 3(2.5,-7)
  oval 2.3x4.6 hole 1.8 square: S1(-4.4,0) S2(4.4,0)
  silkscreen extent -5,-8.61 5,5.5, body extent -5.64,-7.1 5.64,5.55, height 31.6
WE-MPSB_0805_L2W1.2H0.9 [mm] "SMD EMI Multilayer Power Suppression Bead, body 2.00x1.20mm"
  rect 1.4x1 smd: 1(-1.3,0) 2(1.3,0)
  body extent -1,-0.6 1,0.6, height 0.9

## Part data
C1 C9 C21 C28 C30 C35 C37 C41 C43 C45 C46 C47 C48 C49: library part CMP-03422-000081-1, "CC0603 100 nF X7R 10.00% 25 V", Capacitance="100 nF", Manufacturer=YAGEO, Manufacturer Part Number=CC0603KPX7R8BB104, Package=CC0603-DA, Temperature="-55°C to +125°C", Temperature Characteristic=X7R, Temperature Coefficient=15%, Temperature Range High=+125°C, Temperature Range Low=-55°C, Tolerance=0.1, Voltage="25 V", Automotive=No, Category=Cap, ComponentLink2Description=Datasheet, ComponentLink2URL=http://www.yageo.com/documents/recent/UPY-GPHC_X7R_6.3V-to-50V_18.pdf, Device Class L1="Passive Components", Device Class L2=Capacitors, Device Class L3="Ceramic Capacitors", Footprint Url=http://www.yageo.com/exep/pages/download/literatures/UPY-C_GEN_24.pdf, Height=0.9mm, Lead Free=Yes, Material=Ceramic, Mouser Description="Multilayer Ceramic Capacitors MLCC - SMD/SMT 100nF 25V X7R 10%", Octopart=https://octopart.com/cc0603kpx7r8bb104-yageo-12885111, RoHS=TRUE, Voltage Rating="25 V"
C2 C4: library part CMP-1035-02200-3, "CAP CER 4700PF 50V 1% NP0 0603", Capacitance="4,700 pF", Manufacturer=KEMET, Manufacturer Part Number=C0603C472F5GACTU, Package=C0603C-CF, Temperature="-55°C to +125°C", Temperature Characteristic=C0G, Temperature Coefficient=30ppm/°C, Temperature Range High=+125°C, Temperature Range Low=-55°C, Tolerance=0.01, Voltage Rating="50 V", Automotive=Yes, Automotive Grade="Grade 1", Category=Cap, ComponentLink2Description=Datasheet, ComponentLink2URL=https://api.kemet.com/component-edge/download/datasheet/C0603C100J5GACAUTO.pdf, Device Class L1="Passive Components", Device Class L2=Capacitors, Device Class L3="Ceramic Capacitors", Digikey Description="CAP CER 4700PF 50V 1% NP0 0603", Height=0.87mm, Lead Free=Yes, Material=Ceramic, Mouser Description="Multilayer Ceramic Capacitors MLCC - SMD/SMT 50volts 4700pF 1% C0G", Octopart=https://octopart.com/c0603c472f5gactu-kemet-19050072, RoHS=TRUE
C3: library part CMP-03020-010881-2, "CAP CER 1000PF 100V C0G/NP0 0603", Capacitance="1,000 pF", Manufacturer=KEMET, Manufacturer Part Number=C0603C102F1GAC7867, Package=C0603C-CF, Temperature="-55°C to +125°C", Temperature Characteristic=C0G, Temperature Coefficient=30ppm/°C, Temperature Range High=+125°C, Temperature Range Low=-55°C, Tolerance=0.01, Voltage Rating="100 V", Automotive=Yes, Automotive Grade="Grade 1", Category=Cap, ComponentLink2Description=Datasheet, ComponentLink2URL=https://api.kemet.com/component-edge/download/datasheet/C0603C100J5GACAUTO.pdf, Device Class L1="Passive Components", Device Class L2=Capacitors, Device Class L3="Ceramic Capacitors", Digikey Description="CAP CER 1000PF 100V C0G/NP0 0603", Height=0.87mm, Lead Free=Yes, Material=Ceramic, Octopart=https://octopart.com/c0603c102f1gac7867-kemet-25528596, RoHS=TRUE
C5: library part CMP-03020-027223-2, "C0603 470 pF C0G 30ppm/°C 1.00% 50 V", Capacitance="470 pF", Manufacturer=KEMET, Manufacturer Part Number=C0603C471F5GAC, Package=C0603C-CF, Temperature="-55°C to +125°C", Temperature Characteristic=C0G, Temperature Coefficient=30ppm/°C, Temperature Range High=+125°C, Temperature Range Low=-55°C, Tolerance=0.01, Voltage Rating="50 V", Automotive=Yes, Automotive Grade="Grade 1", Category=Cap, ComponentLink2Description=Datasheet, ComponentLink2URL=https://api.kemet.com/component-edge/download/datasheet/C0603C100J5GACAUTO.pdf, Device Class L1="Passive Components", Device Class L2=Capacitors, Device Class L3="Ceramic Capacitors", Height=0.87mm, Lead Free=Yes, Material=Ceramic, Mouser Description="Cap Ceramic 470pF 50V C0G 1% Pad SMD 0603 125C Bulk", Octopart=https://octopart.com/c0603c471f5gac-kemet-9143462, RoHS=TRUE
C6: library part CMP-03020-002782-2, "C0603 1,000 pF C0G 30ppm/°C 1.00% 25 V", Capacitance="1,000 pF", Manufacturer=KEMET, Manufacturer Part Number=C0603C102F3GAC, Package=C0603C-CF, Temperature="-55°C to +125°C", Temperature Characteristic=C0G, Temperature Coefficient=30ppm/°C, Temperature Range High=+125°C, Temperature Range Low=-55°C, Tolerance=0.01, Voltage Rating="25 V", Automotive=Yes, Automotive Grade="Grade 1", Category=Cap, ComponentLink2Description=Datasheet, ComponentLink2URL=https://api.kemet.com/component-edge/download/datasheet/C0603C100J5GACAUTO.pdf, Device Class L1="Passive Components", Device Class L2=Capacitors, Device Class L3="Ceramic Capacitors", Height=0.87mm, Lead Free=Yes, Material=Ceramic, Mouser Description="Multilayer Ceramic Capacitors MLCC - SMD/SMT 25volts 1000pF 1% C0G", Octopart=https://octopart.com/c0603c102f3gac-kemet-9143535, RoHS=TRUE
C7: library part CMP-03020-034715-1, "0.1 µF ±1% 25V Ceramic Capacitor C0G, NP0 1206 (3216 Metric)", RoHS Compliant=Yes
C8: library part CMP-00621-81932632-1, "CC0603KRX5R7BB106 Multilayer Ceramic Capacitor, 10 uF, 16 V, ± 10%, X5R, 0603 [1608 Metric]", Capacitance=10µF, Case/Package=0603, Dielectric=X5R, Max Operating Temperature=85°C, Min Operating Temperature=-55°C, Tolerance=10%, Voltage Rating=16V, Halogen Free="Halogen Free", Height=1mm, Lead Free="Lead Free", Material=Ceramic, NexarPartId=81932632, RoHS=Non-Compliant, Voltage Rating (DC)=16V
C10 C11 C15 C16 C22: library part CMP-06035-045268-1, "Chip Multilayer Ceramic Capacitors for General Purpose, 0603, 10uF, X5R, 15%, 10%, 25V", Case/Package=0603
C12 C13 C17 C18: library part CMP-2006-00951-1, Manufacturer=Vishay, Part Number=VJ0603Y104KXJAR
C14 C19 C29 C32: library part CMP-03422-001238-1, "CAP CER 2.2UF 16V X7R 0603", Capacitance="2.2 uF", Manufacturer=YAGEO, Manufacturer Part Number=CC0603KRX7R7BB225, Package=CC0603-DA, Temperature="-55°C to +125°C", Temperature Characteristic=X7R, Temperature Coefficient=15%, Temperature Range High=+125°C, Temperature Range Low=-55°C, Tolerance=0.1, Voltage="16 V", Automotive=No, Category=Cap, ComponentLink2Description=Datasheet, ComponentLink2URL=http://www.yageo.com/documents/recent/UPY-GPHC_X7R_6.3V-to-50V_18.pdf, Device Class L1="Passive Components", Device Class L2=Capacitors, Device Class L3="Ceramic Capacitors", Digikey Description="CAP CER 2.2UF 16V X7R 0603", Footprint Url=http://www.yageo.com/exep/pages/download/literatures/UPY-C_GEN_24.pdf, Height=0.9mm, Lead Free=Yes, Material=Ceramic, Mouser Description="Cap Ceramic 2.2uF 16V X7R 10% Pad SMD 0603 125C Automotive T/R", Octopart=https://octopart.com/cc0603krx7r7bb225-yageo-67146440, RoHS=TRUE, Voltage Rating="16 V"
C20: library part CMP-03020-015097-1, "C0603 2,200 pF C0G 30ppm/°C 1.00% 200 V", Capacitance="2,200 pF", Manufacturer=KEMET, Manufacturer Part Number=C0603C222F2GAC7411, Package=C0603C-CF, Temperature="-55°C to +125°C", Temperature Characteristic=C0G, Temperature Coefficient=30ppm/°C, Temperature Range High=+125°C, Temperature Range Low=-55°C, Tolerance=0.01, Voltage Rating="200 V", Automotive=Yes, Automotive Grade="Grade 1", Category=Cap, ComponentLink2Description=Datasheet, ComponentLink2URL=https://api.kemet.com/component-edge/download/datasheet/C0603C100J5GACAUTO.pdf, Device Class L1="Passive Components", Device Class L2=Capacitors, Device Class L3="Ceramic Capacitors", Height=0.87mm, Lead Free=Yes, Material=Ceramic, Mouser Description="Multilayer Ceramic Capacitors MLCC - SMD/SMT 200volts 2.2nF 1% C0G", Octopart=https://octopart.com/c0603c222f2gac7411-kemet-104967403, RoHS=TRUE
C23: library part EEE-FTH101XAP, "Description", Manufacturer_Name=Panasonic, Copyright="Copyright (C) 2026 Ultra Librarian. All rights reserved.", Manufacturer_Part_Number=EEE-FTH101XAP
C24 C26 C31 C36 C40 C42: library part CMP-2100-03598-2, "CAP CER 1UF 25V X7R 0603", Capacitance="1 uF", Manufacturer=YAGEO, Manufacturer Part Number=CC0603KRX7R8BB105, Package=CC0603-DA, Temperature="-55°C to +125°C", Temperature Characteristic=X7R, Temperature Coefficient=15%, Temperature Range High=+125°C, Temperature Range Low=-55°C, Tolerance=0.1, Voltage="25 V", Automotive=No, Category=Cap, ComponentLink2Description=Datasheet, ComponentLink2URL=http://www.yageo.com/documents/recent/UPY-GPHC_X7R_6.3V-to-50V_18.pdf, Device Class L1="Passive Components", Device Class L2=Capacitors, Device Class L3="Ceramic Capacitors", Digikey Description="CAP CER 1UF 25V X7R 0603", Footprint Url=http://www.yageo.com/exep/pages/download/literatures/UPY-C_GEN_24.pdf, Height=0.9mm, Lead Free=Yes, Material=Ceramic, Mouser Description="0603 1 uF 25 V ±10% Tolerance X7R SMT Multilayer Ceramic Capacitor", Octopart=https://octopart.com/cc0603krx7r8bb105-yageo-24490981, RoHS=TRUE, Voltage Rating="25 V"
C25: library part CMP-06035-063651-1, "Multilayer Ceramic Capacitor 22uF 20% 16V X5R 0603 Paper T/R"
C27 C44: library part CMP-03422-001217-1, "CAP CER 4.7UF 25V X5R 0603", Capacitance="4.7 uF", Manufacturer=YAGEO, Manufacturer Part Number=CC0603KRX5R8BB475, Package=CC0603-DA, Temperature="-55°C to +125°C", Temperature Characteristic=X5R, Temperature Coefficient=15%, Temperature Range High=+125°C, Temperature Range Low=-55°C, Tolerance=0.1, Voltage="25 V", Automotive=No, Category=Cap, ComponentLink2Description=Datasheet, ComponentLink2URL=http://www.yageo.com/documents/recent/UPY-GPHC_X7R_6.3V-to-50V_18.pdf, Device Class L1="Passive Components", Device Class L2=Capacitors, Device Class L3="Ceramic Capacitors", Digikey Description="CAP CER 4.7UF 25V X5R 0603", Footprint Url=http://www.yageo.com/exep/pages/download/literatures/UPY-C_GEN_24.pdf, Height=0.9mm, Lead Free=Yes, Material=Ceramic, Octopart=https://octopart.com/cc0603krx5r8bb475-yageo-77825350, RoHS=TRUE, Voltage Rating="25 V"
C33 C34: library part CMP-03020-000447-1, "CAP CER 8PF 100V NP0 0603", Capacitance="8.0 pF", Manufacturer=KEMET, Manufacturer Part Number=CBR06C809B1GAC, Package=CBR06C, Temperature="-55°C to +125°C", Temperature Characteristic=C0G, Temperature Coefficient=30ppm/°C, Temperature Range High=+125°C, Temperature Range Low=-55°C, Tolerance="0.1 pF", Voltage Rating="100 V", Automotive=No, Category=Cap, ComponentLink2Description=Datasheet, ComponentLink2URL=https://content.kemet.com/datasheets/KEM_C1030_CBR_SMD.pdf, Device Class L1="Passive Components", Device Class L2=Capacitors, Device Class L3="Ceramic Capacitors", Digikey Description="CAP CER 8PF 100V NP0 0603", Height=0.87mm, Ipc Land Pattern Name=CAPC16080X80, Lead Free=Yes, Material=Ceramic, Octopart=https://octopart.com/cbr06c809b1gac-kemet-23801742, RoHS=TRUE
C38 C39: library part CMP-13271-002004-1, "Cap Ceramic 2.2uF 6.3V X7R ±10% Pad SMD 0603 +125°C T/R", Case Code (Imperial)=0603, Case Code (Metric)=1608, Dielectric=X7R, Max Operating Temperature=125°C, Min Operating Temperature=-55°C, Package Quantity=1, Tolerance=10%, Voltage Rating=6.3V, Capacitance=2.2uF, Case/Package=0603, Depth=0.8mm, Height=0.8mm, Length=0.063inch, Mount="Surface Mount", Packaging="Tape and Reel", Radiation Hardening=No, Thickness=0.035inch, Width=0.031inch
CR1: "Description", Manufacturer_Name="Littelfuse Inc", Copyright="Copyright (C) 2025 Ultra Librarian. All rights reserved.", Manufacturer_Part_Number=P6SMB20A
D1 D2: Package=None, Availability=Unavailable, MF="{'manufacturer': u'Taiwan Semiconductor'}", MP="BAS116 RFG", Price=None
D3 D4: library part CMP-2000-05885-2, "DIODE SCHOTTKY 60V 1A SMA", Average Rectified Current=1A, Capacitance=110pF, Case/Package=SMA, Forward Voltage=700mV, Max Forward Surge Current (Ifsm)=30A, Max Operating Temperature=150°C, Max Repetitive Reverse Voltage (Vrrm)=60V, Min Operating Temperature=-65°C, Package Quantity=5000, Peak Reverse Current=500uA, Contact Plating=Tin, Current Rating=1A, Element Configuration=Single, Forward Current=1A, Height=2.1mm, Lead Free="Lead Free", Length=4.6mm, Max Reverse Voltage (DC)=60V, Mount="Surface Mount", Number of Pins=2, Output Current=1A, Packaging="Tape and Reel", Peak Non-Repetitive Surge Current=30A, Polarity=Standard, Radiation Hardening=No, REACH SVHC="No SVHC", Termination=SMD/SMT, Voltage Rating (DC)=60V, Weight=0.002258oz, Width=2.92mm
DS1: library part CMP-1674-00005-1, "Radial LED, 12.6 mcd, 20 mA, 2 V, -55 to 100 degC, 2-Pin THD, RoHS, Bulk", Case\Package=Radial, Current Rating="3.6 A", Max Operating Temperature="130 degC", Min Operating Temperature="-40 degC", Package Quantity=55, Resistance="0.045 Ohm", Tolerance=20%, ComponentLink1Description="Manufacturer URL", ComponentLink1URL=http://www.us.liteon.com/, ComponentLink2Description=Datasheet, ComponentLink2URL=https://datasheet.ciiva.com/15117/getdatasheetpartid-187746-15117985.pdf, DatasheetVersion=Dec-03, Height="1.1 inch", Lead Pitch="11.44 mm", Length="0.97 inch", Mount="Through Hole", PackageDescription="2-Pin Through Hole Device, Dia 3.8 mm, Pitch 2.54 mm", PackageReference=LTL-1CHE, Packaging=Tray, Radiation Hardening=No, RoHSCompliant=true, Shielding=Unshielded, Width="0.62 inch"
FB1: library part CMP-03913-52738340-1, "74279220601 Ferrite Beads Multi-Layer High Current 600Ohm 25% 100MHz 2.1A 0.08Ohm DCR 0805 Automotive T/R", Case Code (Imperial)=0805, Case Code (Metric)=2012, Current Rating=2.1A, DC Resistance (DCR)=43mΩ, Max Operating Temperature=125°C, Min Operating Temperature=-55°C, Test Frequency=100MHz, Tolerance=25%, Case/Package=0805, Height=900µm, Impedance=600Ω, Length=2mm, Max Current Rating=2.1A, Max DC Current=2.1A, Mount="Surface Mount", NexarPartId=52738340, Number of Lines=1, Packaging="Tape & Reel (TR)", REACH SVHC=Unknown, RoHS=Compliant, Termination=SMD/SMT, Weight=5.499807mg, Width=1.2mm
J2: "6.35 mm, Mono, Right Angle, Through Hole, 2 Conductors, 0 Internal Switches, Audio Jack Connector", Package=None, Check_prices=https://www.snapeda.com/parts/SJ-63062A/Same+Sky/view-part/?ref=eda, MF="Same Sky", MP=SJ-63062A, SnapEDA_Link=https://www.snapeda.com/parts/SJ-63062A/Same+Sky/view-part/?ref=snap
L1: library part ETQ-P3M330KVN, "Description", Manufacturer_Name=Panasonic, Copyright="Copyright (C) 2026 Ultra Librarian. All rights reserved.", Manufacturer_Part_Number=ETQ-P3M330KVN
R1: library part CMP-04015-024131-1, "1.13kΩ ±0.05% 0.1W, 1/10W Chip Resistor 0603 (1608 Metric) Moisture Resistant Thin Film"
R2: library part CMP-03412-024743-1, "RES SMD 10K OHM 0.05% 1/10W 0603", Manufacturer=Yageo, Manufacturer Part Number=RT0603WRE0710KL, Package=RT0603, Power Rating=0.1W, Resistance=10KΩ, Temperature="-55°C to +155°C", Temperature Coefficient="50 ppm/°C", Temperature Range High=+155°C, Temperature Range Low=-55°C, Tolerance=0.0005, Voltage Rating=75V, Automotive=No, Category=Res, ComponentLink2Description=Datasheet, ComponentLink2URL=http://www.yageo.com/documents/recent/PYu-RT_1-to-0.01_RoHS_L_9.pdf, Composition="Thin Film", Device Class L1="Passive Components", Device Class L2=Resistors, Device Class L3="Chip SMD Resistors", Digikey Description="RES SMD 10K OHM 0.05% 1/10W 0603", Footprint Url=http://www.yageo.com/exep/pages/download/literatures/PYu-R_Mount_10.pdf, Height=0.55mm, Ipc Land Pattern Name=RESC16080X45, Lead Free=Yes, Mouser Description="Res SMD 10K Ohm 0.05% 1/10W 0603", Octopart=https://octopart.com/rt0603wre0710kl-yageo-71396825, RoHS=TRUE, Series=RT
R3: library part CMP-03412-028845-1, "RES SMD 680 OHM 0.05% 1/10W 0603", Manufacturer=Yageo, Manufacturer Part Number=RT0603WRD07680RL, Package=RT0603, Power Rating=0.1W, Temperature="-55°C to +155°C", Temperature Coefficient="25 ppm/°C", Temperature Range High=+155°C, Temperature Range Low=-55°C, Tolerance=0.0005, Voltage Rating=75V, Automotive=No, Category=Res, ComponentLink2Description=Datasheet, ComponentLink2URL=http://www.yageo.com/documents/recent/PYu-RT_1-to-0.01_RoHS_L_9.pdf, Composition="Thin Film", Device Class L1="Passive Components", Device Class L2=Resistors, Device Class L3="Chip SMD Resistors", Digikey Description="RES SMD 680 OHM 0.05% 1/10W 0603", Footprint Url=http://www.yageo.com/exep/pages/download/literatures/PYu-R_Mount_10.pdf, Height=0.55mm, Ipc Land Pattern Name=RESC16080X45, Lead Free=Yes, Octopart=https://octopart.com/rt0603wrd07680rl-yageo-71396736, Resistance=680Ω, RoHS=TRUE, Series=RT
R4: library part CMP-04015-019747-1, "15.2kΩ ±0.05% 0.1W, 1/10W Chip Resistor 0603 (1608 Metric) Moisture Resistant Thin Film"
R5: library part CMP-2000-04516-2, "RES SMD 100 OHM 0.1% 1/10W 0603", Manufacturer=Yageo, Manufacturer Part Number=RT0603BRE07100RL, Package=RT0603, Power Rating=0.1W, Temperature="-55°C to +155°C", Temperature Coefficient="50 ppm/°C", Temperature Range High=+155°C, Temperature Range Low=-55°C, Tolerance=0.001, Voltage Rating=75V, Automotive=No, Category=Res, ComponentLink2Description=Datasheet, ComponentLink2URL=http://www.yageo.com/documents/recent/PYu-RT_1-to-0.01_RoHS_L_9.pdf, Composition="Thin Film", Device Class L1="Passive Components", Device Class L2=Resistors, Device Class L3="Chip SMD Resistors", Digikey Description="RES SMD 100 OHM 0.1% 1/10W 0603", Footprint Url=http://www.yageo.com/exep/pages/download/literatures/PYu-R_Mount_10.pdf, Height=0.55mm, Ipc Land Pattern Name=RESC16080X45, Lead Free=Yes, Octopart=https://octopart.com/rt0603bre07100rl-yageo-1483384, Resistance=100Ω, RoHS=TRUE, Series=RT
R6: library part CMP-250906-113146-1, "RES Thin Film,  2.52kΩ, 0.1%, 0.1W, 50ppm/°C, 0603"
R7: library part CMP-03412-019103-1, "RES SMD 14.7K OHM 1/10W 0603", Manufacturer=Yageo, Manufacturer Part Number=RT0603WRD0714K7L, Package=RT0603, Power Rating=0.1W, Resistance=14.7KΩ, Temperature="-55°C to +155°C", Temperature Coefficient="25 ppm/°C", Temperature Range High=+155°C, Temperature Range Low=-55°C, Tolerance=0.0005, Voltage Rating=75V, Automotive=No, Category=Res, ComponentLink2Description=Datasheet, ComponentLink2URL=http://www.yageo.com/documents/recent/PYu-RT_1-to-0.01_RoHS_L_9.pdf, Composition="Thin Film", Device Class L1="Passive Components", Device Class L2=Resistors, Device Class L3="Chip SMD Resistors", Digikey Description="RES SMD 14.7K OHM 1/10W 0603", Footprint Url=http://www.yageo.com/exep/pages/download/literatures/PYu-R_Mount_10.pdf, Height=0.55mm, Ipc Land Pattern Name=RESC16080X45, Lead Free=Yes, Octopart=https://octopart.com/rt0603wrd0714k7l-yageo-71396410, RoHS=TRUE, Series=RT
R8: library part CMP-04015-014252-1, "1.15kΩ ±0.05% 0.1W, 1/10W Chip Resistor 0603 (1608 Metric) Moisture Resistant Thin Film"
R9: library part CMP-03412-006240-1, "RES SMD 68.1K OHM 1/10W 0603", Manufacturer=Yageo, Manufacturer Part Number=RT0603WRE0768K1L, Package=RT0603, Power Rating=0.1W, Resistance=68.1KΩ, Temperature="-55°C to +155°C", Temperature Coefficient="50 ppm/°C", Temperature Range High=+155°C, Temperature Range Low=-55°C, Tolerance=0.0005, Voltage Rating=75V, Automotive=No, Category=Res, ComponentLink2Description=Datasheet, ComponentLink2URL=http://www.yageo.com/documents/recent/PYu-RT_1-to-0.01_RoHS_L_9.pdf, Composition="Thin Film", Device Class L1="Passive Components", Device Class L2=Resistors, Device Class L3="Chip SMD Resistors", Digikey Description="RES SMD 68.1K OHM 1/10W 0603", Footprint Url=http://www.yageo.com/exep/pages/download/literatures/PYu-R_Mount_10.pdf, Height=0.55mm, Ipc Land Pattern Name=RESC16080X45, Lead Free=Yes, Octopart=https://octopart.com/rt0603wre0768k1l-yageo-71397197, RoHS=TRUE, Series=RT
R10 R13: library part CMP-03412-049830-1, "RES 2MΩ 0.50% 0.1W 0603"
R11 R12: library part CMP-03211-001316-1, "RQ73 0603 100KΩ  0.15W 10ppm/°C 0.1% 75V", Manufacturer=TE, Manufacturer Part Number=RQ73C1J100KBTD, Package=RQ731J, Power Rating=0.15W, Resistance=100KΩ, Temperature="-55°C to +155°C", Temperature Coefficient=10ppm/°C, Temperature Range High=+155°C, Temperature Range Low=-55°C, Tolerance=0.1%, Voltage Rating=75V, Automotive=Yes, Automotive Grade="Grade 0", Category=Res, ComponentLink2Description=Datasheet, ComponentLink2URL=https://www.te.com/commerce/DocumentDelivery/DDEController?Action=showdoc&DocId=Data+Sheet%7F1773270-2%7FA%7Fpdf%7FEnglish%7FENG_DS_1773270-2_A.pdf%7F4-2176362-2, Composition="Thin Film", Device Class L1="Passive Components", Device Class L2=Resistors, Device Class L3="Chip SMD Resistors", Height=0.6mm, Ipc Land Pattern Name=RESC15580X45, Lead Free=Yes, Octopart=https://octopart.com/rq73c1j100kbtd-te+connectivity-93908182, RoHS=TRUE, Series=RQ73
R14: library part CMP-03412-030448-1, "RES SMD 470 OHM 0.25% 1/10W 0603", Manufacturer=Yageo, Manufacturer Part Number=RT0603CRE07470RL, Package=RT0603, Power Rating=0.1W, Temperature="-55°C to +155°C", Temperature Coefficient="50 ppm/°C", Temperature Range High=+155°C, Temperature Range Low=-55°C, Tolerance=0.0025, Voltage Rating=75V, Automotive=No, Category=Res, ComponentLink2Description=Datasheet, ComponentLink2URL=http://www.yageo.com/documents/recent/PYu-RT_1-to-0.01_RoHS_L_9.pdf, Composition="Thin Film", Device Class L1="Passive Components", Device Class L2=Resistors, Device Class L3="Chip SMD Resistors", Digikey Description="RES SMD 470 OHM 0.25% 1/10W 0603", Footprint Url=http://www.yageo.com/exep/pages/download/literatures/PYu-R_Mount_10.pdf, Height=0.55mm, Ipc Land Pattern Name=RESC16080X45, Lead Free=Yes, Octopart=https://octopart.com/rt0603cre07470rl-yageo-1250070, Resistance=470Ω, RoHS=TRUE, Series=RT
R15: "10 mm, Vertical, Logarithmic, 10 kÎ©, Through Hole, D-cut Rotary Potentiometer", Package=None, Check_prices=https://www.snapeda.com/parts/PT01-D125D-A103/Same+Sky/view-part/?ref=eda, MF="Same Sky", MP=PT01-D125D-A103, SnapEDA_Link=https://www.snapeda.com/parts/PT01-D125D-A103/Same+Sky/view-part/?ref=snap
R16: library part CMP-02407-011552-1, "RES 0 OHM JUMPER 1/10W 0603", Case Code (Imperial)=0603, Case Code (Metric)=1608, Max Operating Temperature=155°C, Max Power Dissipation=100mW, Min Operating Temperature=-55°C, Resistance=0mR, Resistor Type="Thick Film", Case/Package=0603, Number of Terminations=2, Packaging="Cut Tape", RoHS Compliant=Yes
R17: library part CMP-2000-04526-2, "RES SMD 220 OHM 0.1% 1/10W 0603", Manufacturer=Yageo, Manufacturer Part Number=RT0603BRE07220RL, Package=RT0603, Power Rating=0.1W, Temperature="-55°C to +155°C", Temperature Coefficient="50 ppm/°C", Temperature Range High=+155°C, Temperature Range Low=-55°C, Tolerance=0.001, Voltage Rating=75V, Automotive=No, Category=Res, ComponentLink2Description=Datasheet, ComponentLink2URL=http://www.yageo.com/documents/recent/PYu-RT_1-to-0.01_RoHS_L_9.pdf, Composition="Thin Film", Device Class L1="Passive Components", Device Class L2=Resistors, Device Class L3="Chip SMD Resistors", Digikey Description="RES SMD 220 OHM 0.1% 1/10W 0603", Footprint Url=http://www.yageo.com/exep/pages/download/literatures/PYu-R_Mount_10.pdf, Height=0.55mm, Ipc Land Pattern Name=RESC16080X45, Lead Free=Yes, Octopart=https://octopart.com/rt0603bre07220rl-yageo-1214202, Resistance=220Ω, RoHS=TRUE, Series=RT
R18: library part CMP-03412-022275-2, "Thin Film Chip Resistors Automotive Grade 10kΩ 0.1% 25ppm/°C 0603", Case Code (Imperial)=0603, Case Code (Metric)=1608, Max Operating Temperature=155°C, Max Power Dissipation=100mW, Min Operating Temperature=-55°C, Ratings=AEC-Q200, Resistance=10kR, Resistor Type="Thin Film", Temperature Coefficient=25ppm/°C, Tolerance=0.1%, Case/Package=0603, Features="Moisture Resistant", Height=0.022inch, Length=0.063inch, Number of Terminations=2, Packaging="Cut Tape", RoHS Compliant=Yes, Series=AT, Width=0.032inch
R19: library part CMP-03412-031197-1, "RES SMD 47 OHM 0.1% 1/10W 0603", Manufacturer=Yageo, Manufacturer Part Number=RT0603BRE0747RL, Package=RT0603, Power Rating=0.1W, Temperature="-55°C to +155°C", Temperature Coefficient="50 ppm/°C", Temperature Range High=+155°C, Temperature Range Low=-55°C, Tolerance=0.001, Voltage Rating=75V, Automotive=No, Category=Res, ComponentLink2Description=Datasheet, ComponentLink2URL=http://www.yageo.com/documents/recent/PYu-RT_1-to-0.01_RoHS_L_9.pdf, Composition="Thin Film", Device Class L1="Passive Components", Device Class L2=Resistors, Device Class L3="Chip SMD Resistors", Digikey Description="RES SMD 47 OHM 0.1% 1/10W 0603", Footprint Url=http://www.yageo.com/exep/pages/download/literatures/PYu-R_Mount_10.pdf, Height=0.55mm, Ipc Land Pattern Name=RESC16080X45, Lead Free=Yes, Octopart=https://octopart.com/rt0603bre0747rl-yageo-1447540, Resistance=47Ω, RoHS=TRUE, Series=RT
SW3: "Rotary Switch 12 Position SP12T 350mA (AC) 125 VAC Panel Mount, Through Hole", Package=None, Availability="In Stock", Check_prices=https://www.snapeda.com/parts/KC52A30.001NPS/E-Switch/view-part/?ref=eda, MF=E-Switch, MP=KC52A30.001NPS, Price=None, Purchase-URL=https://pricing.snapeda.com/search/part/KC52A30.001NPS/?ref=eda, SnapEDA_Link=https://www.snapeda.com/parts/KC52A30.001NPS/E-Switch/view-part/?ref=snap
U1: library part CMP-0272-00784-3, "Single-Supply, Rail-to-Rail Operational Amplifier MicroAmplifier(TM) Series, 2.5 to 5.5 V, -40 to 85 degC, 8-pin SOIC (D8), Green (RoHS & no Sb/Br)", Manufacturer="Texas Instruments", Total Supply Voltage(Max)(+5V is 5, +/-5V is 10)=5.5, Total Supply Voltage(Min)(+5V is 5, +/-5V is 10)=2.5, CMRR(Min)(dB)=80, Code_JEDEC=MS-012, ComponentLink1Description="Manufacturer URL", ComponentLink1URL=http://www.ti.com/, ComponentLink2Description=Datasheet, ComponentLink2URL=http://www.ti.com/general/docs/lit/getliterature.tsp?genericPartNumber=OPA2340&fileType=pdf, ComponentLink3Description="Package Specification", ComponentLink3URL=http://www.ti.com/litv/pdf/msoi002j, DatasheetVersion=SBOS073B, Eco-Plan="Green (RoHS & no Sb/Br)", IIB(Max)(pA)=10, Iq per channel(Max)(mA)=0.95, Mounting Technology="Surface Mount", Number of Channels=2, Offset Drift(Typ)(uV/C)=2.5, PackageDescription="8-Pin Plastic Small Outline, Body 4.9 x 3.9 mm, Pitch 1.27 mm", PackageReference=D0008A, PackageVersion="4040047-3/M, 06/2011", PartNumber=OPA2340UA, Slew Rate(Typ)(V/us)=6, Sub Family="Low Input Bias Current Amp (<=10pA), Low Offset Voltage Amplifier (<=500uV), Low Supply Voltage Amplifier (<=2.7V), Precision Amplifier", Vio (25C)(Max)(mV)=0.5, Vn at 1kHz(Typ)(nV/rtHz)=25
U2: "2VRMS DirectPath&trade;, 106dB Audio Stereo DAC with 32-bit, 384kHz PCM Interface 20-TSSOP -25 to 85", Manufacturer_Name="Texas Instruments", Copyright="Copyright (C) 2025 Ultra Librarian. All rights reserved.", Manufacturer_Part_Number=PCM5101APWR, RefDes=RefDes, Type=Type
U3: "38 V, 1.5 A synchronous step-down converter with 20 &#181;A quiescent current", Manufacturer_Name=STMicroelectronics, Copyright="Copyright (C) 2025 Ultra Librarian. All rights reserved.", Manufacturer_Part_Number=L6981N50DR, RefDes=RefDes, Type=Type
U4: library part CMP-12153-000006-1, "IC REG LINEAR 3.3V 1.2A SOT223", Dropout Voltage=350mV, Manufacturer=STMicroelectronics, Max Junction Temp=+125°C, Max Supply Voltage=18V, Min Supply Voltage=2.6V, Nominal Supply Current=250uA, Output Current=2A, Output Voltage=3.3V, Package=SOT223-0046067, Temperature="-40°C to +125°C", Temperature Range Low=-40°C, Accuracy Percentage=2%, Automotive=No, Category=IC, ComponentLink2Description=Datasheet, ComponentLink2URL=https://www.st.com/resource/en/datasheet/ldl1117.pdf, Device Class L1="Integrated Circuits (ICs)", Device Class L2="Power Management ICs", Device Class L3="Voltage Regulators - Linear", Digikey Description="IC REG LINEAR 3.3V 1.2A SOT223", Height=1.9mm, Ipc Land Pattern Name=SOT230P700X190-4, Lead Free=Yes, Manufacturer Part Number=LDL1117S33R, Mouser Description="LDL1117 Series 1.2 A 3.3 V High PSRR LDO Linear Voltage Regulator-SOT-223", Number of Outputs=1, Octopart=https://octopart.com/ldl1117s33r-stmicroelectronics-81876163, Output Type=Fixed, RoHS=TRUE, Standoff Height=0.02mm, Temperature Range High=+125°C
U5: "Low-Voltage, Dual-Supply, SPDT Analog Switch with Enable", Package="SOT-8 Maxim", Check_prices=https://www.snapeda.com/parts/MAX4564EKA+T/Analog+Devices/view-part/?ref=eda, MF="Analog Devices", MP=MAX4564EKA+T, SnapEDA_Link=https://www.snapeda.com/parts/MAX4564EKA+T/Analog+Devices/view-part/?ref=snap
U6: "Switched Capacitor Inverter", Package="SOT-23-6 Texas Instruments", Check_prices=https://www.snapeda.com/parts/LM2776DBVR/Texas+Instruments/view-part/?ref=eda, MF="Texas Instruments", MP=LM2776DBVR, SnapEDA_Link=https://www.snapeda.com/parts/LM2776DBVR/Texas+Instruments/view-part/?ref=snap
U7: "High-performance and DSP with DP-FPU, Arm Cortex-M7 MCU with 512 Kbytes Flash, 564 Kbytes RAM, 550 MHz CPU, L1 cache, external memory interface, subset of peripherals", Manufacturer_Name=STMicroelectronics, Copyright="Copyright (C) 2026 Ultra Librarian. All rights reserved.", Manufacturer_Part_Number=STM32H723VET6, RefDes=RefDes, Type=Type
Y1: library part CMP-00005-81936285-1, "Crystal 25.0000Mhz 8Pf Smd Rohs Compliant: Yes", ComponentLink2Description="Datasheet URL", ComponentLink2URL=https://abracon.com/datasheets/ABM8W.pdf, HelpURL=https://abracon.com/datasheets/ABM8W.pdf, RoHS=Compliant, Schedule B=8541600080

## Free pads (board coordinates)
  round 0.6 hole 0.6 unplated mask+0: 0(0.8,19.3) 0(1.8,19.3) 0(2.8,19.3) 0(3.8,19.3) 0(4.8,19.3) 0(5.8,19.3) 0(27.35,19.3) 0(28.35,19.3) 0(29.35,19.3) 0(30.35,19.3) 0(31.35,19.3) 0(32.35,19.3) 0(51.075,19.3) 0(52.075,19.3) 0(53.075,19.3) 0(54.075,19.3) 0(55.075,19.3) 0(56.075,19.3) 0(77.6,19.3) 0(78.6,19.3) 0(79.6,19.3) 0(80.6,19.3) 0(81.6,19.3) 0(82.6,19.3)

## Via types
v1: diameter 0.7, hole 0.3, Top Layer to Bottom Layer, 113 vias